# Allegro board BVP_04V3.brd
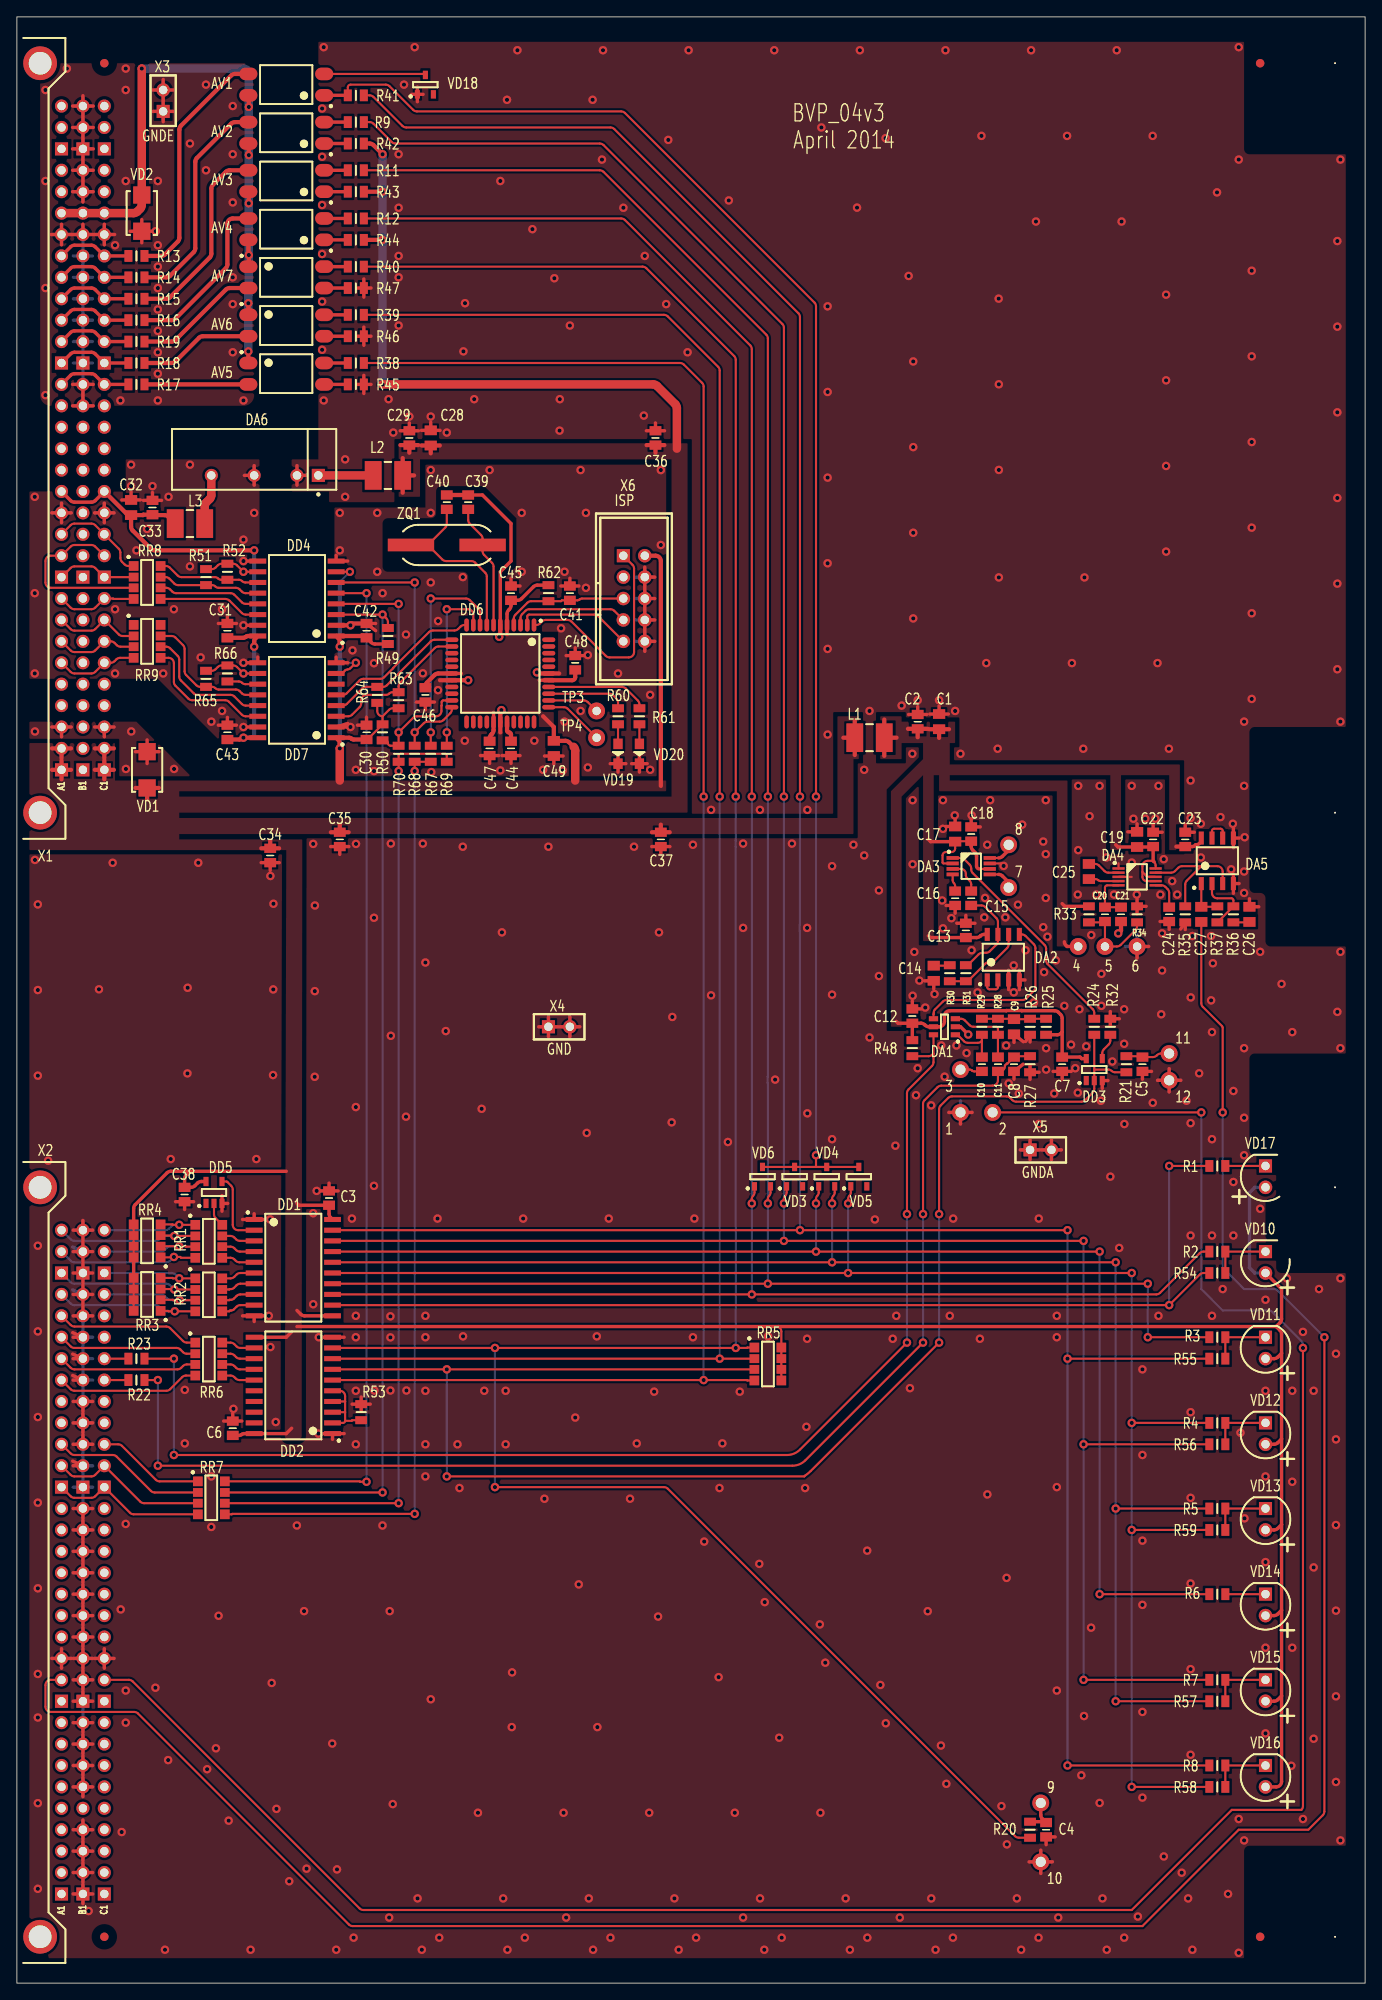
[diagram p0: board, top side]
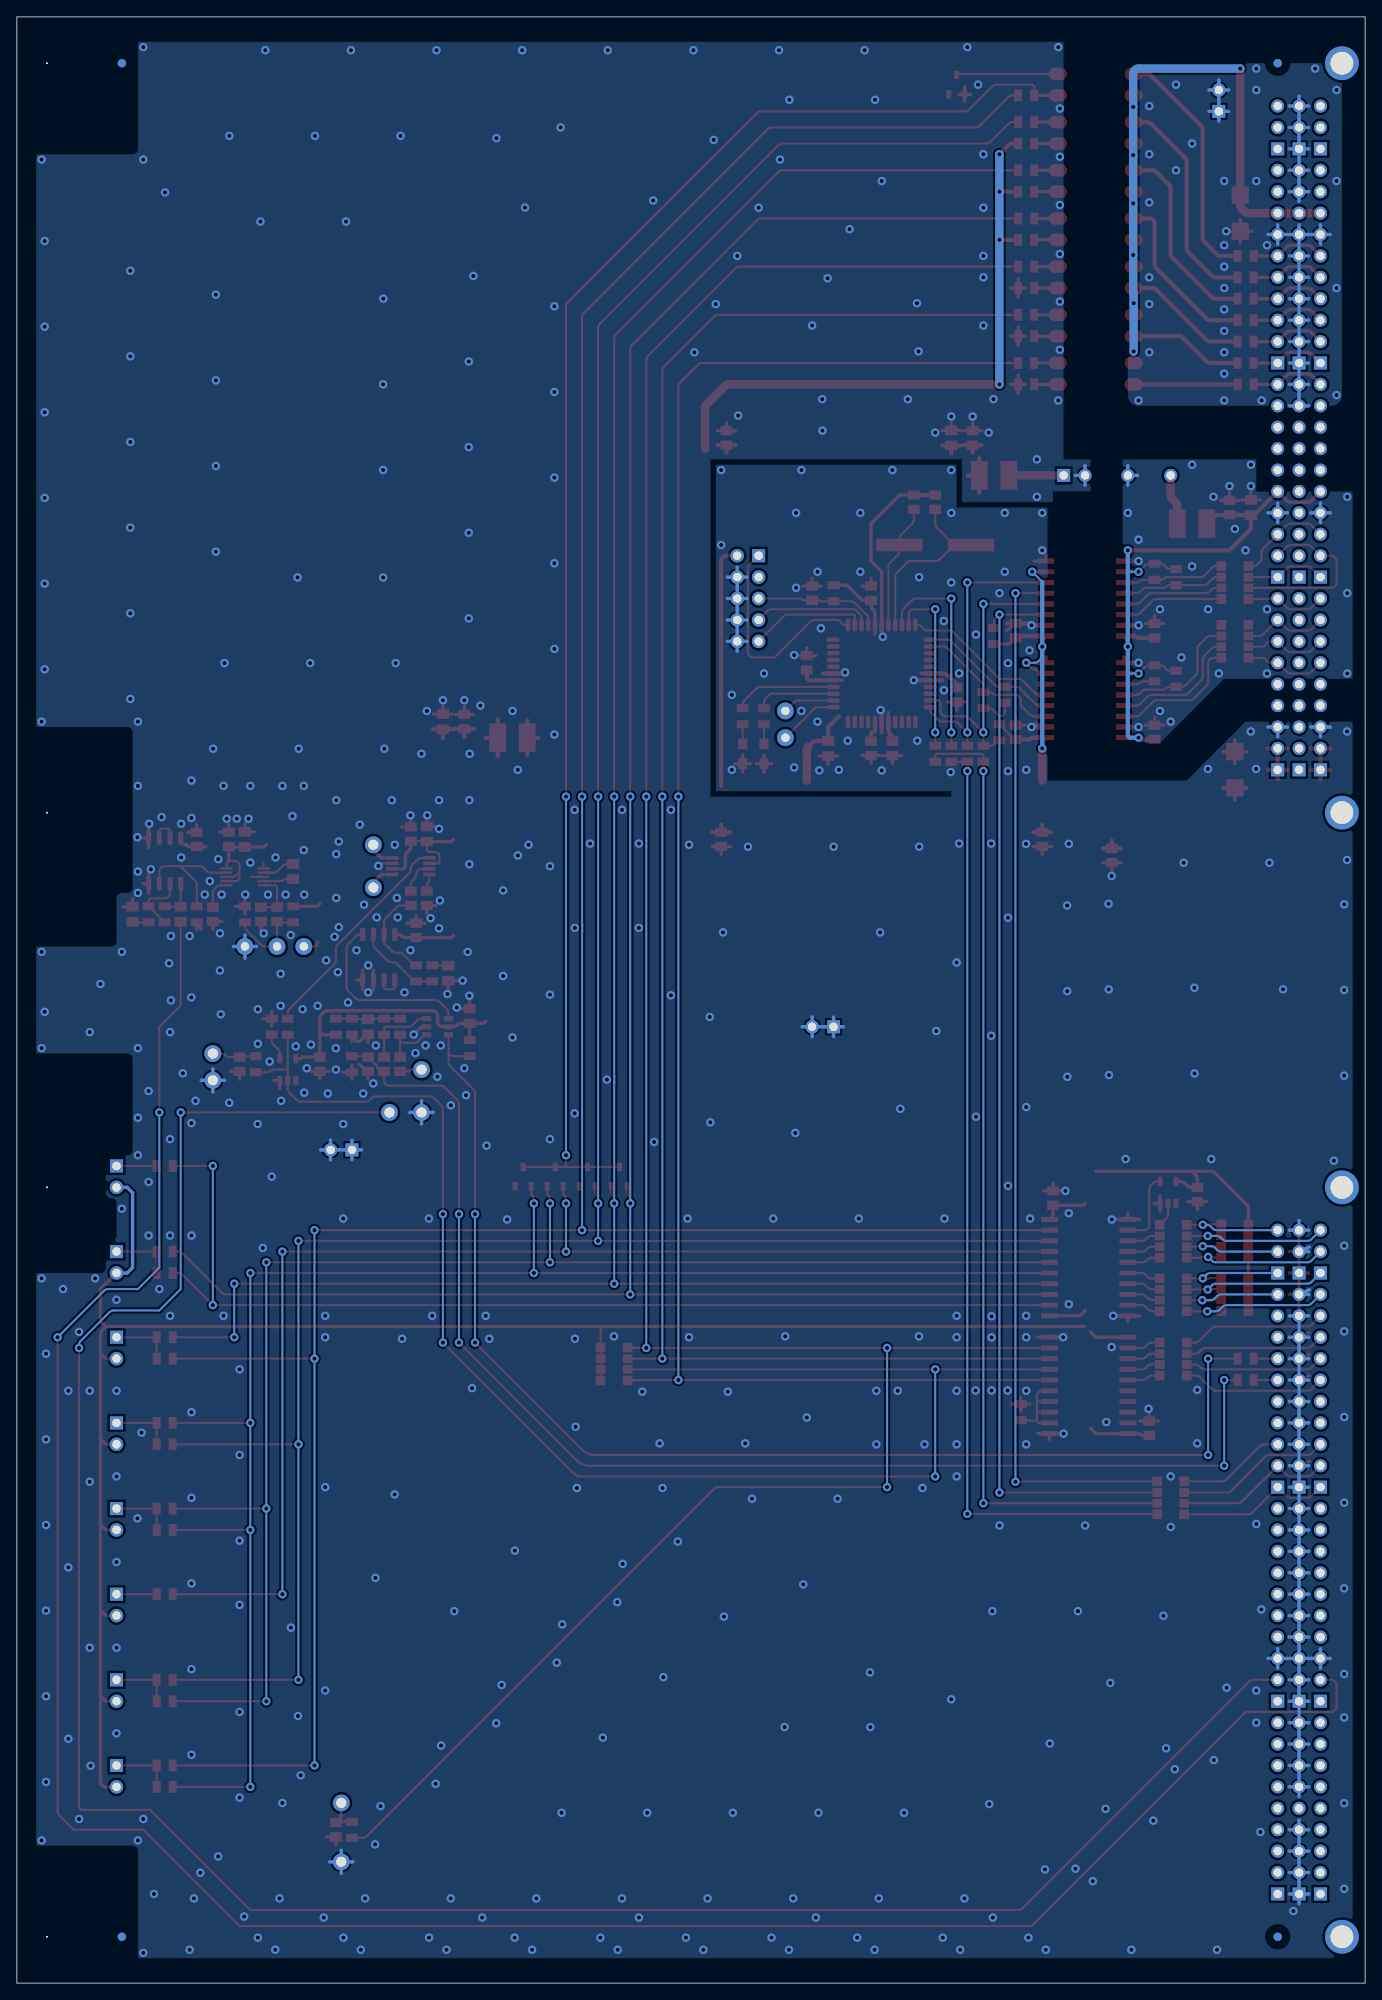
[diagram p1: board, bottom side, seen from below]

Outline 160 x 233.25 mm; copper layers: TOP, BOTTOM. Coordinates in mm from the lower left corner of the outline.
Outline path: rectangle 0,0 160,233.25

## Design rules (mm)
net group PWR: nets +5BA +5BR +24BE
nets with their own width: min track width 0.4; nets +5B GND GNDE GNDR

## Placement (name value [footprint] x y rotation side)
AV1  HCPL-817-300E  [SOIC254P1000X370-4N]  31.97 225.21 180 top
AV2  HCPL-817-300E  [SOIC254P1000X370-4N]  31.97 219.5 180 top
AV3  HCPL-817-300E  [SOIC254P1000X370-4N]  31.97 213.78 180 top
AV4  HCPL-817-300E  [SOIC254P1000X370-4N]  31.97 208.06 180 top
AV5  HCPL-817-300E  [SOIC254P1000X370-4N]  31.97 190.92 0 top
AV6  HCPL-817-300E  [SOIC254P1000X370-4N]  31.97 196.63 0 top
AV7  HCPL-817-300E  [SOIC254P1000X370-4N]  31.97 202.35 0 top
C1  10.0u  [CAPC2013X145N]  109.44 149.65 90 top
C2  0.1u  [CAPC2013X95N]  106.9 149.65 90 top
C3  0.1u  [CAPC2013X95N]  37.05 93.13 90 top
C4  0.1u  [CAPC2013X95N]  122.14 18.2 270 top
C5  0.1u  [CAPC2013X95N]  133.57 109 270 top
C6  0.1u  [CAPC2013X95N]  25.62 65.83 90 top
C7  0.1u  [CAPC2013X95N]  124.05 109 270 top
C8  1000p  [CAPC2013X95N]  118.33 109 270 top
C9  10.0u  [CAPC2013X145N]  118.33 113.45 270 top
C10  0.1u  [CAPC2013X95N]  114.52 109 90 top
C11  0.1u  [CAPC2013X95N]  116.43 109 270 top
C12  0.1u  [CAPC2013X95N]  106.27 114.72 270 top
C13  0.1u  [CAPC2013X95N]  112.62 124.88 270 top
C14  10.0u  [CAPC2013X145N]  108.81 119.8 270 top
C15  0.1u  [CAPC2013X95N]  113.25 128.69 90 top
C16  0.1u  [CAPC2013X95N]  111.34 128.69 90 top
C17  10.0u  [CAPC2013X145N]  111.34 136.31 90 top
C18  0.1u  [CAPC2013X95N]  113.25 136.31 270 top
C19  10.0u  [CAPC2013X145N]  132.94 135.68 90 top
C20  0.1u  [CAPC2013X95N]  129.12 126.78 90 top
C21  1000p  [CAPC2013X95N]  131.03 126.78 90 top
C22  0.1u  [CAPC2013X95N]  134.84 135.68 90 top
C23  0.1u  [CAPC2013X95N]  138.65 135.68 90 top
C24  2.2u  [CAPC2013X95N]  136.75 126.78 270 top
C25  10.0u  [CAPC2013X145N]  127.22 131.87 270 top
C26  10.0u  [CAPC2013X145N]  146.27 126.78 90 top
C27  10.0u  [CAPC2013X145N]  140.55 126.78 270 top
C28  10.0u  [CAPC2013X145N]  49.11 183.3 90 top
C29  0.1u  [CAPC2013X95N]  46.57 183.3 90 top
C30  0.1u  [CAPC2013X95N]  41.49 148.38 90 top
C31  0.1u  [CAPC2013X95N]  24.98 160.44 90 top
C32  10.0u  [CAPC2013X145N]  13.55 175.04 90 top
C33  0.1u  [CAPC2013X95N]  16.09 175.04 90 top
C34  0.1u  [CAPC2013X95N]  30.06 133.77 270 top
C35  0.1u  [CAPC2013X95N]  38.32 135.68 270 top
C36  0.1u  [CAPC2013X95N]  75.79 183.3 90 top
C37  0.1u  [CAPC2013X95N]  76.42 135.68 270 top
C38  0.1u  [CAPC2013X95N]  19.91 93.55 270 top
C39  22p  [CAPC2013X70N]  53.56 175.68 270 top
C40  22p  [CAPC2013X70N]  51.02 175.68 270 top
C41  0.1u  [CAPC2013X95N]  65.62 164.88 90 top
C42  0.1u  [CAPC2013X95N]  41.49 160.44 90 top
C43  0.1u  [CAPC2013X95N]  24.98 148.38 90 top
C44  0.1u  [CAPC2013X95N]  58.64 146.47 270 top
C45  0.1u  [CAPC2013X95N]  58.64 164.88 90 top
C46  0.1u  [CAPC2013X95N]  48.48 152.82 270 top
C47  0.1u  [CAPC2013X95N]  56.1 146.47 270 top
C48  0.1u  [CAPC2013X95N]  66.26 156.63 90 top
C49  10.0u  [CAPC2013X145N]  63.72 146.47 270 top
DA1  TS5A3160  [SOT95P280X145-6N]  110.08 113.45 180 top
DA2  AD8532  [SOIC127P600X175-8N]  117.06 121.7 90 top
DA3  SSM2301  [SOP65P490X110-8N]  113.25 132.5 0 top
DA4  SSM2167  [SOP50P490X110-10N]  132.94 131.23 0 top
DA5  AD8532  [SOIC127P600X175-8N]  142.46 133.13 90 top
DA6  TMA 0505S  [SIP720W50P254L1950H1050Q7P_S1KV]  28.16 180.76 270 top
DD1  74ACT573  [SOIC127P1030X265-20N]  32.81 84.88 0 top
DD2  74ACT573  [SOIC127P1030X265-20N]  32.81 70.91 180 top
DD3  SN74LVC1G14DBV  [SOT95P280X145-5N]  127.86 108.37 90 top
DD4  ADuM3402  [SOIC127P1032X265-16N]  33.24 164.25 180 top
DD5  SN74LVC1G14DBV  [SOT95P280X145-5N]  23.4 93.8 90 top
DD6  ATmega164  [QFP80P1200X1200X120-44N]  57.37 155.36 270 top
DD7  ADuM3402  [SOIC127P1032X265-16N]  33.24 152.19 180 top
L1  10u  [INDC4532X280N]  101.19 147.74 0 top
L2  10u  [INDC4532X280N]  44.03 178.85 180 top
L3  10u  [INDC4532X280N]  20.54 173.14 180 top
MH1  1  [MTG_100_200]  111.98 103.29 0 top
MH2  2  [MTG_100_200]  115.79 103.29 0 top
MH3  3  [MTG_100_200]  111.98 108.37 0 top
MH4  4  [MTG_085_200]  125.95 122.97 0 top
MH5  5  [MTG_085_200]  129.12 122.97 0 top
MH6  6  [MTG_085_200]  132.94 122.97 0 top
MH7  7  [MTG_100_200]  117.7 129.96 0 top
MH8  8  [MTG_100_200]  117.7 135.04 0 top
MH9  9  [MTG_100_200]  121.51 21.38 0 top
MH10  10  [MTG_100_200]  121.51 14.39 0 top
MH11  11  [MTG_100_200]  136.75 110.28 0 top
MH12  12  [MTG_100_200]  136.75 107.1 0 top
MH13  TP4  [MTG_085_200]  68.8 147.74 0 top
MH14  TP3  [MTG_085_200]  68.8 150.91 0 top
NOREF  -  [unnamed]  156.43 227.75 0 top
NOREF#2  -  [unnamed]  156.43 138.85 0 top
NOREF#3  -  [unnamed#2]  10.38 227.75 0 top
NOREF#4  -  [unnamed#2]  147.54 5.5 0 top
NOREF#5  -  [unnamed]  156.43 94.4 0 top
NOREF#6  -  [unnamed]  156.43 5.5 0 top
NOREF#7  -  [unnamed#2]  10.38 5.5 0 top
NOREF#8  -  [unnamed#2]  147.54 227.75 0 top
NOREF#9  -  [unnamed#2]  10.38 5.5 180 bottom
NOREF#10  -  [unnamed#2]  10.38 227.75 180 bottom
NOREF#11  -  [unnamed#2]  147.54 5.5 180 bottom
NOREF#12  -  [unnamed#2]  147.54 227.75 180 bottom
R1  1k  [RESC2013X60N]  142.46 96.94 0 top
R2  5.1k  [RESC2013X60N]  142.46 86.78 0 top
R3  5.1k  [RESC2013X60N]  142.46 76.62 0 top
R4  5.1k  [RESC2013X60N]  142.46 66.46 0 top
R5  5.1k  [RESC2013X60N]  142.46 56.3 0 top
R6  5.1k  [RESC2013X60N]  142.46 46.14 0 top
R7  5.1k  [RESC2013X60N]  142.46 35.98 0 top
R8  5.1k  [RESC2013X60N]  142.46 25.82 0 top
R9  510  [RESC2013X60N]  40.23 220.76 180 top
R11  510  [RESC2013X60N]  40.23 215.05 180 top
R12  510  [RESC2013X60N]  40.23 209.34 180 top
R13  2k  [RESC2013X60N]  14.19 204.89 180 top
R14  2k  [RESC2013X60N]  14.19 202.35 180 top
R15  2k  [RESC2013X60N]  14.19 199.81 180 top
R16  2k  [RESC2013X60N]  14.19 197.27 180 top
R17  2k  [RESC2013X60N]  14.19 189.65 0 top
R18  2k  [RESC2013X60N]  14.19 192.19 0 top
R19  2k  [RESC2013X60N]  14.19 194.73 0 top
R20  100  [RESC2013X60N]  120.23 18.2 270 top
R21  100  [RESC2013X60N]  131.66 109 270 top
R22  100k  [RESC2013X60N]  14.19 71.54 0 top
R23  100  [RESC2013X60N]  14.19 74.08 0 top
R24  100  [RESC2013X60N]  127.86 113.45 90 top
R25  1k  [RESC2013X60N]  122.14 113.45 270 top
R26  1k  [RESC2013X60N]  120.23 113.45 90 top
R27  10k  [RESC2013X60N]  120.23 109 270 top
R28  100k  [RESC2013X60N]  116.43 113.45 270 top
R29  100k  [RESC2013X60N]  114.52 113.45 270 top
R30  10k  [RESC2013X60N]  110.71 119.8 270 top
R31  20k  [RESC2013X60N]  112.62 119.8 90 top
R32  100  [RESC2013X60N]  129.76 113.45 90 top
R33  5.1k  [RESC2013X60N]  127.22 126.78 90 top
R34  20k  [RESC2013X60N]  132.94 126.78 270 top
R35  20k  [RESC2013X60N]  138.65 126.78 90 top
R36  10k  [RESC2013X60N]  144.36 126.78 90 top
R37  20k  [RESC2013X60N]  142.46 126.78 90 top
R38  51  [RESC2013X60N]  40.23 192.19 0 top
R39  51  [RESC2013X60N]  40.23 197.91 0 top
R40  51  [RESC2013X60N]  40.23 203.62 0 top
R41  1k  [RESC2013X60N]  40.23 223.94 180 top
R42  510  [RESC2013X60N]  40.23 218.22 180 top
R43  510  [RESC2013X60N]  40.23 212.51 180 top
R44  510  [RESC2013X60N]  40.23 206.79 180 top
R45  51  [RESC2013X60N]  40.23 189.65 0 top
R46  51  [RESC2013X60N]  40.23 195.37 0 top
R47  51  [RESC2013X60N]  40.23 201.08 0 top
R48  10k  [RESC2013X60N]  106.27 110.91 90 top
R49  10k  [RESC2013X60N]  44.03 159.81 270 top
R50  10k  [RESC2013X60N]  43.4 148.38 90 top
R51  10k  [RESC2013X60N]  22.45 166.79 90 top
R52  10k  [RESC2013X60N]  24.98 167.43 90 top
R53  10k  [RESC2013X60N]  40.86 67.73 270 top
R54  5.1k  [RESC2013X60N]  142.46 84.24 0 top
R55  5.1k  [RESC2013X60N]  142.46 74.08 0 top
R56  5.1k  [RESC2013X60N]  142.46 63.92 0 top
R57  5.1k  [RESC2013X60N]  142.46 33.44 0 top
R58  5.1k  [RESC2013X60N]  142.46 23.28 0 top
R59  5.1k  [RESC2013X60N]  142.46 53.76 0 top
R60  1k  [RESC2013X60N]  71.34 150.28 90 top
R61  1k  [RESC2013X60N]  73.88 150.28 90 top
R62  10k  [RESC2013X60N]  63.09 164.88 270 top
R63  10k  [RESC2013X60N]  45.3 152.19 270 top
R64  10k  [RESC2013X60N]  42.77 152.82 270 top
R65  10k  [RESC2013X60N]  22.45 154.72 90 top
R66  10k  [RESC2013X60N]  24.98 155.36 90 top
R67  0  [RESC2013X60N]  49.11 145.84 270 top
R68  0  [RESC2013X60N]  47.21 145.84 270 top
R69  0  [RESC2013X60N]  51.02 145.84 270 top
R70  0  [RESC2013X60N]  45.3 145.84 270 top
RR1  100  [RESCAX127P320X508X70-8N]  22.77 88 0 top
RR2  100  [RESCAX127P320X508X70-8N]  22.77 81.65 0 top
RR3  10k  [RESCAX127P320X508X70-8N]  15.46 81.7 180 top
RR4  10k  [RESCAX127P320X508X70-8N]  15.46 88.05 180 top
RR5  10k  [RESCAX127P320X508X70-8N]  89.12 73.44 0 top
RR6  100  [RESCAX127P320X508X70-8N]  22.77 74.03 0 top
RR7  100  [RESCAX127P320X508X70-8N]  23.08 57.57 0 top
RR8  100  [RESCAX127P320X508X70-8N]  15.46 166.16 0 top
RR9  100  [RESCAX127P320X508X70-8N]  15.46 159.17 0 top
VD1  6.8B  [DIOM5236X261N_NP]  15.46 143.93 90 top
VD2  30B  [DIOM5236X261N_NP]  14.82 209.97 270 top
VD3  BAT54A  [SOT95P230X110-3N]  92.3 95.67 90 top
VD4  BAT54A  [SOT95P230X110-3N]  96.11 95.67 90 top
VD5  BAT54A  [SOT95P230X110-3N]  99.92 95.67 90 top
VD6  BAT54A  [SOT95P230X110-3N]  88.48 95.67 90 top
VD10  Red  [LEDRD254W60D590H900USR]  148.17 85.51 270 top
VD11  Red  [LEDRD254W60D590H900USR]  148.17 75.35 270 top
VD12  Red  [LEDRD254W60D590H900USR]  148.17 65.19 270 top
VD13  Red  [LEDRD254W60D590H900USR]  148.17 55.03 270 top
VD14  Red  [LEDRD254W60D590H900USR]  148.17 44.87 270 top
VD15  Red  [LEDRD254W60D590H900USR]  148.17 34.71 270 top
VD16  Red  [LEDRD254W60D590H900USR]  148.17 24.55 270 top
VD17  Green  [LEDRD254W60D590H900USR]  148.17 95.67 270 top
VD18  BAT54A  [SOT95P230X110-3N]  48.48 225.21 90 top
VD19  Green  [LEDC2012X110N]  71.34 145.84 270 top
VD20  Green  [LEDC2012X110N]  73.88 145.84 270 top
X1  DIN-32x3  [DIN_41612_96_MR]  2.12 183.3 0 top
X2  DIN-32x3  [DIN_41612_96_MR]  2.12 49.95 0 top
X3  GNDE  [HDRV1X2P254]  17.37 223.31 90 top
X4  GND  [HDRV1X2P254]  64.36 113.45 0 top
X5  GNDA  [HDRV1X2P254]  121.51 98.84 0 top
X6  ISP  [IDC_10M]  73.25 164.25 0 top
ZQ1  20MHz  [XTAL1140X450X420N]  51.02 170.6 0 top

## Library data of the parts
AV1-AV7 = K1010: alternate symbols: (SOIC254P1000X370-4M)
C1-C49 = CAP_NP
DA1 = TS5A3159_g
DA2 DA5 = AD8532AR_G
DA3 = SSM2301_G
DA4 = SSM2167_G
DA6 = SIP7_SINGLE_4_6
DD1 DD2 = 74ACT573
DD3 DD5 = 74LVC1G14_G
DD4 DD7 = ADUM3402
DD6 = ATMEGA164_TQFP
L1-L3 = INDUCTOR
MH1-MH14 = MOUNTING_HOLE_PLATED
R1-R9 R11-R70 = RES_0.125W
RR1-RR9 = RES_ARRAY_4
VD1 VD2 = DIODE_TVS_BI
VD3-VD6 VD18 = DIODE_SCHOTTKY_DUAL_A
VD10-VD17 VD19 VD20 = DIODE_LED
X1 X2 = CON_32x3
X3-X5 = CON_2
X6 = CON_10_AVR_ISP
ZQ1 = QUARTZ_HC49

## Footprints (pads in the part's own frame, mm; a bottom-side part is the same pattern mirrored in y, then rotated)
CAPC2013X70N
  rect 1.1x1.4 smd: 1(-0.85,0) 2(0.85,0)
CAPC2013X95N
  rect 1.1x1.4 smd: 1(-0.85,0) 2(0.85,0)
CAPC2013X145N
  rect 1.15x1.45 smd: 1(-0.9,0) 2(0.9,0)
DIN_41612_96_MR
  rect 1.55x1.55 hole 1: A1(3.175,-39.37) A10(3.175,-16.51) A20(3.175,8.89) A30(3.175,34.29) B1(5.715,-39.37) B10(5.715,-16.51) B20(5.715,8.89) B30(5.715,34.29) C1(8.255,-39.37) C10(8.255,-16.51) C20(8.255,8.89) C30(8.255,34.29)
  round 1.55 hole 1: A2(3.175,-36.83) A3(3.175,-34.29) A4(3.175,-31.75) A5(3.175,-29.21) A6(3.175,-26.67) A7(3.175,-24.13) A8(3.175,-21.59) A9(3.175,-19.05) A11(3.175,-13.97) A12(3.175,-11.43) A13(3.175,-8.89) A14(3.175,-6.35) A15(3.175,-3.81) A16(3.175,-1.27) A17(3.175,1.27) A18(3.175,3.81) A19(3.175,6.35) A21(3.175,11.43) A22(3.175,13.97) A23(3.175,16.51) A24(3.175,19.05) A25(3.175,21.59) A26(3.175,24.13) A27(3.175,26.67) A28(3.175,29.21) A29(3.175,31.75) A31(3.175,36.83) A32(3.175,39.37) B2(5.715,-36.83) B3(5.715,-34.29) B4(5.715,-31.75) B5(5.715,-29.21) B6(5.715,-26.67) B7(5.715,-24.13) B8(5.715,-21.59) B9(5.715,-19.05) B11(5.715,-13.97) B12(5.715,-11.43) B13(5.715,-8.89) B14(5.715,-6.35) B15(5.715,-3.81) B16(5.715,-1.27) B17(5.715,1.27) B18(5.715,3.81) B19(5.715,6.35) B21(5.715,11.43) B22(5.715,13.97) B23(5.715,16.51) B24(5.715,19.05) B25(5.715,21.59) B26(5.715,24.13) B27(5.715,26.67) B28(5.715,29.21) B29(5.715,31.75) B31(5.715,36.83) B32(5.715,39.37) C2(8.255,-36.83) C3(8.255,-34.29) C4(8.255,-31.75) C5(8.255,-29.21) C6(8.255,-26.67) C7(8.255,-24.13) C8(8.255,-21.59) C9(8.255,-19.05) C11(8.255,-13.97) C12(8.255,-11.43) C13(8.255,-8.89) C14(8.255,-6.35) C15(8.255,-3.81) C16(8.255,-1.27) C17(8.255,1.27) C18(8.255,3.81) C19(8.255,6.35) C21(8.255,11.43) C22(8.255,13.97) C23(8.255,16.51) C24(8.255,19.05) C25(8.255,21.59) C26(8.255,24.13) C27(8.255,26.67) C28(8.255,29.21) C29(8.255,31.75) C31(8.255,36.83) C32(8.255,39.37)
  round 4 hole 2.7: HOLE1(0.635,-44.45) HOLE2(0.635,44.45)
DIOM5236X261N_NP
  rect 2.05x2.05 smd: A(2.15,0) C(-2.15,0)
HDRV1X2P254
  rect 1.55x1.55 hole 1: 1(-1.27,0)
  round 1.6 hole 1: 2(1.27,0)
IDC_10M
  rect 1.55x1.55 hole 1: 1(-1.27,5.08)
  round 1.6 hole 1: 2(1.27,5.08) 3(-1.27,2.54) 4(1.27,2.54) 5(-1.27,0) 6(1.27,0) 7(-1.27,-2.54) 8(1.27,-2.54) 9(-1.27,-5.08) 10(1.27,-5.08)
INDC4532X280N
  rect 2x3.4 smd: 1(-1.75,0) 2(1.75,0)
LEDC2012X110N
  rect 1.25x1.1 smd: A(-1.175,0) C(1.175,0)
LEDRD254W60D590H900USR
  round 1.6 hole 1: A(1.27,0)
  rect 1.55x1.55 hole 1: C(-1.27,0)
MTG_085_200
  round 2 hole 1: 1(0,0)
MTG_100_200
  round 2 hole 1.2: 1(0,0)
QFP80P1200X1200X120-44N
  oval 1.55x0.55 smd: 1(-5.75,4) 2(-5.75,3.2) 3(-5.75,2.4) 4(-5.75,1.6) 5(-5.75,0.8) 6(-5.75,0) 7(-5.75,-0.8) 8(-5.75,-1.6) 9(-5.75,-2.4) 10(-5.75,-3.2) 11(-5.75,-4) 23(5.75,-4) 24(5.75,-3.2) 25(5.75,-2.4) 26(5.75,-1.6) 27(5.75,-0.8) 28(5.75,0) 29(5.75,0.8) 30(5.75,1.6) 31(5.75,2.4) 32(5.75,3.2) 33(5.75,4)
  oval 0.55x1.55 smd: 12(-4,-5.75) 13(-3.2,-5.75) 14(-2.4,-5.75) 15(-1.6,-5.75) 16(-0.8,-5.75) 17(0,-5.75) 18(0.8,-5.75) 19(1.6,-5.75) 20(2.4,-5.75) 21(3.2,-5.75) 22(4,-5.75) 34(4,5.75) 35(3.2,5.75) 36(2.4,5.75) 37(1.6,5.75) 38(0.8,5.75) 39(0,5.75) 40(-0.8,5.75) 41(-1.6,5.75) 42(-2.4,5.75) 43(-3.2,5.75) 44(-4,5.75)
RESC2013X60N
  rect 0.95x1.4 smd: 1(-0.95,0) 2(0.95,0)
RESCAX127P320X508X70-8N
  rect 1.15x1.15 smd: 1(-1.6,1.955) 4(-1.6,-1.955) 5(1.6,-1.955) 8(1.6,1.955)
  rect 1.15x1.05 smd: 2(-1.6,0.635) 3(-1.6,-0.635) 6(1.6,-0.635) 7(1.6,0.635)
SIP720W50P254L1950H1050Q7P_S1KV
  rect 1.55x1.55 hole 1: 1(1.905,7.62)
  round 1.55 hole 1: 2(1.905,5.08) 4(1.905,0) 6(1.905,-5.08)
SOIC127P600X175-8N
  rect 1.55x0.6 smd: 1(-2.7,1.905) 2(-2.7,0.635) 3(-2.7,-0.635) 4(-2.7,-1.905) 5(2.7,-1.905) 6(2.7,-0.635) 7(2.7,0.635) 8(2.7,1.905)
SOIC127P1030X265-20N
  rect 2x0.6 smd: 1(-4.65,5.715) 2(-4.65,4.445) 3(-4.65,3.175) 4(-4.65,1.905) 5(-4.65,0.635) 6(-4.65,-0.635) 7(-4.65,-1.905) 8(-4.65,-3.175) 9(-4.65,-4.445) 10(-4.65,-5.715) 11(4.65,-5.715) 12(4.65,-4.445) 13(4.65,-3.175) 14(4.65,-1.905) 15(4.65,-0.635) 16(4.65,0.635) 17(4.65,1.905) 18(4.65,3.175) 19(4.65,4.445) 20(4.65,5.715)
SOIC127P1032X265-16N
  rect 2x0.6 smd: 1(-4.65,4.445) 2(-4.65,3.175) 3(-4.65,1.905) 4(-4.65,0.635) 5(-4.65,-0.635) 6(-4.65,-1.905) 7(-4.65,-3.175) 8(-4.65,-4.445) 9(4.65,-4.445) 10(4.65,-3.175) 11(4.65,-1.905) 12(4.65,-0.635) 13(4.65,0.635) 14(4.65,1.905) 15(4.65,3.175) 16(4.65,4.445)
SOIC254P1000X370-4N
  oval 2.15x1.5 smd: 1(-4.5,1.27) 2(-4.5,-1.27) 3(4.5,-1.27) 4(4.5,1.27)
SOP50P490X110-10N
  rect 1.45x0.3 smd: 1(-2.2,1) 2(-2.2,0.5) 3(-2.2,0) 4(-2.2,-0.5) 5(-2.2,-1) 6(2.2,-1) 7(2.2,-0.5) 8(2.2,0) 9(2.2,0.5) 10(2.2,1)
SOP65P490X110-8N
  rect 1.45x0.45 smd: 1(-2.2,0.975) 2(-2.2,0.325) 3(-2.2,-0.325) 4(-2.2,-0.975) 5(2.2,-0.975) 6(2.2,-0.325) 7(2.2,0.325) 8(2.2,0.975)
SOT95P230X110-3N
  rect 1x0.6 smd: 1(-1.15,0.95) 2(-1.15,-0.95) 3(1.15,0)
SOT95P280X145-5N
  rect 1.1x0.6 smd: 1(-1.3,0.95) 2(-1.3,0) 3(-1.3,-0.95) 4(1.3,-0.95) 5(1.3,0.95)
SOT95P280X145-6N
  rect 1.1x0.6 smd: 1(-1.3,0.95) 2(-1.3,0) 3(-1.3,-0.95) 4(1.3,-0.95) 5(1.3,0) 6(1.3,0.95)
unnamed
  round 0.2 hole 2.7 unplated: (0,0)
unnamed#2
  round 1 smd: (0,0)
XTAL1140X450X420N
  rect 5.5x1.5 smd: 1(-4.25,0) 2(4.25,0)

## Nets
GND: C1.2 C2.2 C3.2 C4.2 C5.2 C6.2 C7.2 C8.2 C9.2 C12.1 C13.1 C14.2 C16.1 C17.2 C18.1 C19.2 C21.1 C22.2 C23.2 C24.2 C26.2 C28.2 C29.2 C30.2 C34.2 C35.2 C36.2 C37.2 C38.2 C39.1 C40.1 C41.2 C42.2 C44.2 C45.2 C46.2 C47.2 C48.2 C49.2 DA1.2(GND) DA2.3(IN+) DA2.4(GND) DA3.7(GND) DA4.1(GND) DA4.3(EN) DA5.4(GND) DA5.5(IN+) DA6.2(-VIN) DD1.1(O\E\) DD1.10(GND) DD2.1(O\E\) DD2.10(GND) DD3.3(GND) DD4.2(1GND1) DD4.8(2GND1) DD5.3(GND) DD6.6(GND) DD6.18(GND#18) DD6.28(GND#28) DD6.39(GND#39) DD7.2(1GND1) DD7.8(2GND1) MH1.1 MH6.1 MH10.1 MH12.1 R26.1 R27.2 R32.2 R34.1 R35.1 R45.2 R46.2 R47.2 R53.1 VD1.A VD18.1(C1) VD19.C VD20.C X1.A3 X1.C3 X2.A12 X2.B1 X2.B2 X2.B3 X2.B4 X2.B6 X2.B7 X2.B8 X2.B9 X2.B10 X2.B11 X2.B12 X2.B13 X2.B14 X2.B15 X2.B16 X2.B17 X2.B18 X2.B19 X2.B20 X2.B21 X2.B22 X2.B23 X2.B24 X2.B25 X2.B26 X2.B27 X2.B28 X2.B29 X2.B30 X2.B31 X2.B32 X2.C12 X4.1 X4.2 X5.1 X5.2 X6.4(GND#1) X6.6(GND#2) X6.8(GND#3) X6.10(GND#4)
GNDE: VD2.A X1.A26 X1.B15 X1.B16 X1.B17 X1.B18 X1.B19 X1.B20 X1.B21 X1.B22 X1.B23 X1.B24 X1.B25 X1.B26 X1.B28 X1.B29 X1.B30 X1.B31 X1.B32 X1.C26 X3.1 X3.2
GNDR: C31.2 C32.2 C33.2 C43.2 DA6.4(-VOUT) DD4.9(2GND2) DD4.15(1GND2) DD7.9(2GND2) DD7.15(1GND2) X1.A13 X1.C13
1#PRD: R15.2 X1.A23 X1.C23
1#PRM: R16.2 X1.A22 X1.C22
1#WARN: R14.2 X1.A24 X1.C24
1ALARM: R13.2 X1.A25 X1.C25
1CLEAR: R18.1 X1.A20 X1.C20
1CTRLTM: R17.1 X1.A19 X1.C19
1ENDR: RR9.4 X1.A6 X1.C6
1PUSK: R19.1 X1.A21 X1.C21
1RXDR: RR9.2 X1.A8 X1.C8
1RXLN: RR8.2 X1.A10 X1.C10
1RXTM: RR8.1 X1.A12 X1.C12
1TXDR: RR9.3 X1.A7 X1.C7
1TXLN: RR8.4 X1.A9 X1.C9
1TXTM: RR8.3 X1.A11 X1.C11
+5B: C3.1 C6.1 C28.1 C29.1 C30.1 C34.1 C35.1 C36.1 C37.1 C38.1 C42.1 C45.1 C46.1 C47.1 C48.1 C49.1 DD1.11(LE) DD1.20(VCC) DD2.11(LE) DD2.20(VCC) DD4.1(VCC1) DD4.7(EN1) DD5.5(VCC) DD6.5(VCC) DD6.17(VCC#17) DD6.27(AVCC) DD6.38(VCC#38) DD7.1(VCC1) DD7.7(EN1) L1.1 L2.1 R42.1 R43.1 R44.1 R49.2 R50.2 R62.1 R63.2 R64.2 RR3.5 RR3.6 RR3.7 RR3.8 RR4.5 RR4.6 RR4.7 RR4.8 RR5.5 RR5.6 RR5.7 RR5.8 VD1.C VD10.A VD11.A VD12.A VD13.A VD14.A VD15.A VD16.A VD17.A X1.A1 X1.A2 X1.C1 X1.C2 X6.2(VCC)
+5BA: C1.1 C2.1 C7.1 C12.2 C13.2 C17.1 C18.2 C19.1 C22.1 C23.1 DA1.5(VCC) DA2.8(VCC) DA3.2(G) DA3.6(VCC) DA4.7(GATE) DA4.8(CMP) DA4.10(VCC) DA5.8(VCC) DD3.5(VCC) L1.2 MH4.1 R25.2 R33.2 R48.2
+5BR: C31.1 C32.1 C33.1 C43.1 DD4.10(EN2) DD4.16(VCC2) DD7.10(EN2) DD7.16(VCC2) L3.2 R51.2 R52.2 R65.2 R66.2 X1.A14 X1.C14
+24BE: AV1.4 AV2.4 AV3.4 AV4.4 AV5.1 AV6.1 AV7.1 VD2.C X1.A27 X1.B27 X1.C27
BUSR4: RR6.1 X2.A28
BUSR5: RR6.2 X2.A27
BUSR6: RR6.3 X2.A26
BUSR7: RR6.4 X2.A25
BUSW4: X2.C28
BUSW5: X2.C27
BUSW6: R23.1 X2.C26
BUSW7: R22.1 X2.C25
D#AC: DD1.17(Q3) R6.1 VD4.1(C1)
D#CONTROL: DD1.12(Q8) R1.1 R54.1
D#CURRENT: DD1.13(Q7) R2.1 R12.1 VD6.1(C1)
D#DISTPRM: DD1.16(Q4) R5.1 R57.1 VD4.2(C2)
D#HFRESTORE: DD1.14(Q6) R3.1 R11.1 VD6.2(C2)
D#SELFPRM: DD1.15(Q5) R4.1 R58.1 R59.1 VD5.1(C1)
D#WARN: DD1.18(Q2) R7.1 R9.1 R56.1 VD3.1(C1)
DALARM: DD1.19(Q1) R8.1 R41.1 R55.1
EN_AMP: DD2.7(D6) DD3.2(IN) R21.2 R24.1 RR5.3
EN_MCU: DD3.4(OUT) R32.1
ENDR: DD6.13(PD4/XCK1/OC1B) DD7.3(INA) R63.1
RXBSP: DD6.9(PD0/RXD0) R67.1
RXDR: DD6.11(PD2/RXD1/INT0) DD7.5(OUTC)
RXLN: RR7.2 X2.A22
RXLN_F1: DD4.5(OUTC) RR7.8
RXTALK: C27.2 X2.A11
RXTM: RR7.4 X2.A20 X2.C20
RXTM_F1: DD4.6(OUTD) DD6.22(PC3/TMS) R68.1
SOUT0: RR2.4 RR3.1 X2.A29
SOUT1: RR2.3 RR3.2 X2.C29
SOUT2: RR2.2 RR3.3 X2.A30
SOUT3: RR2.1 RR3.4 X2.C30
SOUT4: RR1.4 RR4.1 X2.A31
SOUT5: RR1.3 RR4.2 X2.C31
SOUT6: RR1.2 RR4.3 X2.A32
SOUT7: RR1.1 RR4.4 X2.C32
TP1: DD6.37(ADC0/PA0) R61.2
TP2: DD6.36(ADC1/PA1) R60.2
TP3: DD6.35(ADC2/PA2) MH14.1
TP4: DD6.34(ADC3/PA3) MH13.1
TXBSP: DD6.10(PD1/TXD0) R69.1
TXDR: DD6.12(PD3/TXD1/INT1) DD7.4(INB) R64.1
TXLN: RR7.1 X2.C22
TXLN_F1: DD4.3(INA) R49.1 RR7.7
TXTALK: MH2.1 X2.C11
TXTM: RR7.3 X2.A21 X2.C21
TXTM_F1: DD4.4(INB) DD6.21(PC2/TCK) R50.1 R70.1
XTAL1: C39.2 DD6.7(XTAL2) ZQ1.2
XTAL2: C40.2 DD6.8(XTAL1) ZQ1.1
N00551: AV7.3 R47.1
N01425: DD4.13(OUTB) RR8.6
N01429: DD4.12(INC) R51.1 RR8.7
N01441: DD4.11(IND) R52.1 RR8.8
N01449: DD4.14(OUTA) RR8.5
N02822: DA6.6(+VOUT) L3.1
N02871: DA6.1(+VIN) L2.2
N73819: DD2.8(D7) R39.2 RR5.2
N73834: DD2.9(D8) R20.2 R40.2 RR5.1
N73844: AV6.3 R46.1
N73856: AV5.3 R45.1
N77519: C10.2 DA1.1(NO) R29.2
N79567: DA1.4(COM) DA2.5(IN+)
N79970: C15.1 DA2.7(OUT) R31.2
N79985: DA2.6(IN-) R30.2 R31.1
N80092: DA2.1(OUT) DA2.2(IN-)
N80558: C15.2 DA3.3(IN+)
N80562: C16.2 DA3.4(IN-)
N80654: AV1.3 R13.1
N80678: DA3.1(EN) R24.2
N80919: AV2.3 R14.1
N81113: AV3.3 R15.1
N81310: AV4.3 R16.1
N83264: DA1.6(#) R23.2 R48.1
N83320: C9.1 R25.1 R26.2 R28.1 R29.1
N83604: C11.1 DA1.3(NC) R28.2
N85983: C8.1 C11.2 R22.2 R27.1
N94026: DA3.5(OUT+) MH7.1
N94035: DA3.8(OUT-) MH8.1
N96238: C20.2 C21.2 DA4.5(IN)
N96360: C25.1 DA4.2(VCA)
N96364: C25.2 DA4.4(BUF)
N96415: C24.1 DA4.6(AVG)
N96714: DA4.9(OUT) DA5.3(IN+) R35.2
N97065: C27.1 DA5.1(OUT) R37.2
N97073: DA5.2(IN-) R36.2 R37.1
N97121: C26.1 R36.1
N97223: DA5.6(IN-) DA5.7(OUT)
N99861: C20.1 MH5.1 R33.1 R34.2
N109598: AV1.1 R41.2 VD3.3(M) VD4.3(M) VD5.3(M) VD6.3(M)
N110708: C14.1 R30.1
N132934: C44.1 DD6.29(AREF)
N133699: C10.1 MH3.1
N148228: DD1.3(D2) RR1.7
N148236: DD1.4(D3) RR1.6
N148244: DD1.5(D4) RR1.5
N172935: AV5.4 R38.1
N172947: AV6.4 R39.1
N172960: AV7.4 R40.1
N176118: DD2.15(Q5) RR6.5
N176122: DD2.14(Q6) RR6.6
N176130: DD2.13(Q7) RR6.7
N176164: DD2.12(Q8) RR6.8
N178870: DD1.6(D5) RR2.8
N178876: DD1.7(D6) RR2.7
N178882: DD1.9(D8) RR2.5
N178888: DD1.8(D7) RR2.6
N179993: DD2.6(D5) R38.2 RR5.4
N182772: DD2.2(D1) DD2.3(D2) DD2.4(D3) DD2.5(D4) R53.2
N185164: AV6.2 R18.2
N185176: AV5.2 R17.2
N185500: R8.2 R58.2 VD16.C
N187191: AV7.2 R19.2
N188360: R2.2 R54.2 VD10.C
N193282: R7.2 R57.2 VD15.C
N193291: R4.2 R56.2 VD12.C
N193304: R3.2 R55.2 VD11.C
N194967: DD5.2(IN) RR1.8
N194988: DD1.2(D1) DD5.4(OUT)
N204600: R5.2 R59.2 VD13.C
N204692: C4.1 MH9.1 R20.1
N206929: C5.1 MH11.1 R21.1
N208084: AV1.2 VD18.3(M)
N211418: R1.2 VD17.C
N211442: R6.2 VD14.C
N211458: AV2.2 R9.2
N211470: AV4.2 R12.2
N211474: AV3.2 R11.2
N211478: AV2.1 R42.2
N211482: AV4.1 R44.2
N211486: AV3.1 R43.2
N276676: DD7.13(OUTB) RR9.6
N276680: DD7.12(INC) R65.1 RR9.7
N276692: DD7.11(IND) R66.1
N276700: DD7.14(OUTA) RR9.5
N280105: R61.1 VD20.A
N280109: R60.1 VD19.A
N289709: DD6.3(PB7/SCK) X6.7(SCK)
N290445: C41.1 DD6.4(R\E\S\E\T\) R62.2 X6.5(R\S\T\)
N290460: DD6.1(PB5/MOSI) X6.1(MOSI)
N290475: DD6.2(PB6/MISO) X6.9(MISO)
N304283: R67.2 R68.2 RR7.5
N304298: R69.2 R70.2 RR7.6

Pads without a net: DD2 16 17 18 19; DD3 1; DD5 1; DD6 14 15 16 19 20 23 24 25 26 30 31 32 33 40 41 42 43 44; DD7 6; RR9 1 8; VD3 2; VD5 2; VD18 2; X1 A4 A5 A15 A16 A17 A18 A28 A29 A30 A31 A32 B1 B2 B3 B4 B5 B6 B7 B8 B9 B10 B11 B12 B13 B14 C4 C5 C15 C16 C17 C18 C28 C29 C30 C31 C32 HOLE1 HOLE2; X2 A1 A2 A3 A4 A5 A6 A7 A8 A9 A10 A13 A14 A15 A16 A17 A18 A19 A23 A24 B5 C1 C2 C3 C4 C5 C6 C7 C8 C9 C10 C13 C14 C15 C16 C17 C18 C19 C23 C24 HOLE1 HOLE2; X6 3

## Via types
v1: diameter 1, hole 0.5, TOP to BOTTOM, 722 vias

## Routing (per net, layer and track width the routed paths; a pad name or vN(x,y) marks a point on that pad's centre or on a via; arc(x,y) is an arc through that point)
GND: length 620
  TOP w0.25: DA4.3 132.3,131.23 ; v1(117.1,132.53) 116.81,132.82 DA3.7 ; DA4.1 130.73,132.84
  TOP w0.4: VD20.C 73.88,145.66 ; VD20.C 72.95,144.66 ; VD20.C 73.88,143.66 ; VD20.C 74.81,144.66 ; VD19.C 72.27,144.66 ; VD19.C 71.34,143.66 ; VD19.C 70.41,144.66 ; VD19.C 71.34,145.66 ; 65.62,165.74 66.7,165.74 ; 65.62,165.74 64.55,165.74 ; 65.62,165.74 65.62,166.66 ; 117.7,120.16 DA2.3 117.7,117.85 ; X2.B11 8.99,35.98 ; X2.B11 7.84,37.13 ; X2.B11 7.84,34.83 ; X2.B11 6.69,35.98 ; X6.6 75.69,164.25 ; X6.6 74.52,163.07 ; X6.6 74.52,165.43 ; 39.27,149.42 DD7.2 39.27,149.01 ; 35.97,93.98 C3.2 ; C3.2 37.05,94.91 ; C3.2 38.13,93.98 ; 7.84,29.75 X2.B9 ; X2.B9 6.69,30.9 ; X2.B9 8.99,30.9 ; 118.33,111.6 C9.2 119.43,111.68 ; X2.B15 8.99,46.14 ; X2.B15 7.84,44.99 ; X2.B15 6.69,46.14 ; X2.B15 7.84,47.29 ; MH1.1 113.36,103.29 ; MH1.1 111.98,101.91 ; MH1.1 110.6,103.29 ; X2.B14 8.99,43.6 ; X2.B14 7.84,42.45 ; X2.B14 6.69,43.6 ; X2.B14 7.84,44.75 ; 7.84,80.55 X2.B29 ; X2.B29 6.69,81.7 ; X2.B29 8.99,81.7 ; X2.B29 7.84,82.85 ; X2.B13 8.99,41.06 ; X2.B13 7.84,42.21 ; X2.B13 7.84,39.91 ; X2.B13 6.69,41.06 ; 6.69,66.46 X2.B23 ; X2.B23 8.99,66.46 ; X2.B23 7.84,65.31 ; X2.B23 7.84,67.61 ; 146.27,128.64 C26.2 147.37,127.69 ; DD2.1 38.84,65.19 ; DD2.1 37.46,64.51 ; DD2.1 36.08,65.19 ; 119.41,109 C8.2 118.33,107.23 ; 6.69,61.38 X2.B21 6.63,61.92 ; R46.2 41.17,196.44 ; R46.2 42.03,195.37 ; R46.2 41.17,194.29 ; R46.2 40.32,195.37 ; R32.2 130.84,114.4 ; R32.2 129.76,113.55 ; R32.2 129.76,115.25 ; 28.16,78.48 DD1.10 ; DD1.10 29.54,79.16 ; DD1.10 26.78,79.16 ; X2.C12 10.38,39.67 ; X2.C12 9.23,38.52 ; X2.C12 11.53,38.52 ; X2.C12 10.38,37.37 ; 113.25,138.09 C18.1 114.33,137.16 ; X2.B28 7.84,80.31 ; X2.B28 8.99,79.16 ; X2.B28 6.69,79.16 ; X2.B17 8.99,51.22 ; X2.B17 6.69,51.22 ; X2.B17 7.84,50.07 ; X2.B17 7.84,52.37 ; 128.81,106.14 DD3.3 129.48,107.07 ; 6.69,48.68 X2.B16 ; X2.B16 8.99,48.68 ; X2.B16 7.84,49.83 ; X2.B16 7.84,47.53 ; X4.2 65.62,114.63 ; X4.2 65.62,112.27 ; X4.2 64.45,113.45 ; X4.2 66.8,113.45 ; X2.B4 8.99,18.2 ; X2.B4 7.84,19.35 ; X2.B4 7.84,17.05 ; X2.B4 6.69,18.2 ; X2.B7 7.84,26.97 ; X2.B7 8.99,25.82 ; X2.B7 6.69,25.82 ; X2.B7 7.84,24.67 ; 5.3,37.37 X2.A12 ; X2.A12 5.3,39.67 ; X2.A12 4.15,38.52 ; X2.A12 6.45,38.52 ; C36.2 75.79,185.08 ; C36.2 76.86,184.15 ; C36.2 74.71,184.15 ; 6.69,23.28 X2.B6 ; X2.B6 7.84,22.13 ; X2.B6 7.84,24.43 ; X2.B6 8.99,23.28 ; 7.84,37.37 X2.B12 ; X2.B12 8.99,38.52 ; X2.B12 7.84,39.67 ; X2.B12 6.69,38.52 ; C47.2 57.18,145.62 ; C47.2 55.02,145.62 ; C47.2 56.1,144.69 ; R47.2 41.17,202.16 ; R47.2 40.32,201.08 ; R47.2 42.03,201.08 ; R47.2 41.17,200 ; C13.1 112.62,126.66 ; C13.1 113.69,125.73 ; C13.1 111.54,125.73 ; 118.97,117.85 DA2.4 ; DA2.4 119.64,119 ; DA2.4 118.97,120.16 ; 107.34,115.57 C12.1 106.27,116.5 ; X2.B22 7.84,65.07 ; X2.B22 6.69,63.92 ; X2.B22 8.99,63.92 ; 138.11,125.04 R35.1 138.65,124.98 ; 134.84,137.45 C22.2 135.92,136.53 ; 136.75,105.72 MH12.1 ; MH12.1 138.12,107.1 ; MH12.1 135.37,107.1 ; MH12.1 136.75,108.48 ; 37.24,134.82 38.32,134.82 ; 38.32,134.82 38.32,133.9 ; 38.32,134.82 39.4,134.82 ; 41.17,188.57 R45.2 ; R45.2 42.03,189.65 ; R45.2 40.32,189.65 ; R45.2 41.17,190.73 ; 134.65,108.16 C5.2 133.57,107.23 ; 6.69,28.36 X2.B8 ; X2.B8 7.84,27.21 ; X2.B8 7.84,29.51 ; X2.B8 8.99,28.36 ; R53.1 40.86,69.53 ; R53.1 41.94,68.68 ; R53.1 39.78,68.68 ; R53.1 40.86,67.83 ; 105.82,150.5 C2.2 ; C2.2 106.9,151.42 ; C2.2 107.98,150.5 ; DD1.1 28.16,91.27 ; DD1.1 26.78,90.59 ; DD1.1 29.54,90.59 ; 30.06,131.99 C34.2 ; C34.2 28.99,132.92 ; C34.2 31.14,132.92 ; DD5.3 25.02,92.5 ; DD5.3 24.34,91.57 ; DD5.3 24.34,93.42 ; X2.B30 7.84,85.39 ; X2.B30 7.84,83.09 ; X2.B30 6.69,84.24 ; X2.B30 8.99,84.24 ; 4.15,149.01 X1.A3 ; X1.A3 5.3,147.86 ; X1.A3 6.45,149.01 ; 39.27,168.69 DD4.8 37.89,169.37 ; 108.34,150.54 109.44,150.54 ; 109.44,150.54 109.44,151.5 ; 109.44,150.54 110.54,150.54 ; 6.69,89.32 X2.B32 ; X2.B32 8.99,89.32 ; X2.B32 7.84,90.47 ; X2.B32 7.84,88.17 ; 74.52,157.99 X6.10 ; X6.10 74.52,160.35 ; X6.10 75.69,159.17 ; 65.18,157.48 C48.2 ; C48.2 66.26,158.41 ; C48.2 67.34,157.48 ; 122.97,108.16 C7.2 ; C7.2 124.05,107.23 ; C7.2 125.12,108.16 ; X6.4 75.69,166.79 ; X6.4 74.52,167.97 ; X6.4 74.52,165.61 ; 76.42,133.9 76.42,134.82 ; 76.42,134.82 77.5,134.82 ; 76.42,134.82 75.34,134.82 ; MH10.1 122.88,14.39 ; MH10.1 120.13,14.39 ; MH10.1 121.51,15.77 ; MH10.1 121.51,13.01 ; 45.5,184.15 C29.2 ; C29.2 47.65,184.15 ; C29.2 46.57,185.08 ; 39.27,156.63 DD7.8 37.89,157.31 ; X2.B2 7.84,14.27 ; X2.B2 8.99,13.12 ; X2.B2 7.84,11.97 ; X2.B2 6.69,13.12 ; 120.23,111.65 R26.1 119.7,111.71 ; 7.84,52.61 X2.B18 ; X2.B18 8.99,53.76 ; X2.B18 6.69,53.76 ; X2.B18 7.84,54.91 ; 33.24,177.7 DA6.2 ; DA6.2 34.39,178.85 ; DA6.2 33.24,180.01 ; 48.01,184.2 C28.2 ; C28.2 49.11,185.15 ; C28.2 50.22,184.2 ; 6.69,76.62 X2.B27 6.63,77.17 ; 121.6,98.84 X5.2 ; X5.2 122.78,97.67 ; X5.2 122.78,100.02 ; X5.2 123.95,98.84 ; 120.23,108.06 120.23,108.91 ; 120.23,108.06 120.23,107.2 ; 120.23,108.06 121.31,108.06 ; 61.93,113.45 X4.1 ; X4.1 63.09,112.3 ; X4.1 63.09,114.6 ; X4.1 64.24,113.45 ; X2.B19 8.99,56.3 ; X2.B19 7.84,55.15 ; X2.B19 6.69,56.3 ; 7.84,67.85 X2.B24 ; X2.B24 8.99,69 ; X2.B24 6.69,69 ; X2.B1 8.99,10.58 ; X2.B1 7.84,9.43 ; X2.B1 6.69,10.58 ; X2.B1 7.84,11.73 ; 110.27,127.84 C16.1 111.34,126.91 ; 6.69,33.44 X2.B10 ; X2.B10 7.84,34.59 ; X2.B10 8.99,33.44 ; 134.31,122.97 MH6.1 132.94,121.6 ; 123.22,17.35 C4.2 122.14,16.42 ; 46.85,224.06 VD18.1 ; VD18.1 47.53,224.94 ; VD18.1 48.21,224.06 ; VD18.1 47.53,223.18 ; 138.65,137.45 C23.2 139.73,136.53 ; DD6.6 57.37,167.43 58.64,168.69 58.64,173.14 55.25,176.53 C39.1 ; VD1.A 16.86,146.08 ; VD1.A 15.46,147.48 ; VD1.A 14.06,146.08 ; VD1.A 15.46,144.68 ; 6.63,74.62 X2.B26 6.69,74.08 ; 132.94,137.53 C19.2 131.83,136.57 ; 42.57,161.29 C42.2 42.57,160.44 ; 58.64,144.69 C44.2 ; C44.2 57.56,145.62 ; C44.2 59.72,145.62 ; X5.1 120.23,100 ; X5.1 120.23,97.69 ; X5.1 121.39,98.84 ; X5.1 119.08,98.84 ; X2.B3 7.84,16.81 ; X2.B3 6.69,15.66 ; X2.B3 7.84,14.51 ; X2.B3 8.99,15.66 ; DA5.4 145.04,130.44 ; DA5.4 144.36,131.59 ; DA5.4 144.36,129.28 ; 24.54,66.67 C6.2 ; C6.2 26.7,66.67 ; C6.2 25.62,67.6 ; 62.62,145.57 C49.2 ; C49.2 64.82,145.57 ; C49.2 63.72,144.62 ; 40.42,149.22 C30.2 41.49,150.15 ; 47.4,151.97 C46.2 ; C46.2 48.48,151.04 ; C46.2 49.56,151.97 ; 9.23,149.01 X1.C3 ; X1.C3 10.38,147.86 ; X1.C3 11.53,149.01 ; 6.69,71.54 X2.B25 6.63,72.08 ; 58.64,166.66 58.64,165.74 59.72,165.74 ; 136.75,125.01 C24.2 135.67,125.94 ; 108.81,117.95 C14.2 107.7,118.9 ; C38.2 20.98,92.7 ; C38.2 18.83,92.7 ; C38.2 19.91,91.77 ; 74.52,160.53 X6.8 ; X6.8 75.69,161.71 ; X6.8 74.52,162.89 ; 6.69,86.78 X2.B31 ; X2.B31 7.84,85.63 ; X2.B31 8.99,86.78 ; X2.B31 7.84,87.93 ; 132.94,126.88 R34.1 ; R34.1 132.94,128.59 ; R34.1 134.01,127.73 ; DA1.2 111.98,113.45 v1(112.9,112.53) ; DA5.5 145.04,135.84 ; DA5.5 144.36,136.99 ; DA5.5 144.36,134.68 ; 36.08,76.62 DD2.10 38.84,76.62 ; 110.24,137.21 C17.2 111.34,138.16
  TOP w0.5: DD6.6 57.37,159.84 v1(57.24,159.71) ; v1(130.7,124.53) 131.03,124.86 C21.1 ; 50.22,154.56 DD6.18 v1(53.56,154.56) ; 64.36,155.36 DD6.39 61.85,155.36 v1(61.72,155.49) ; C42.2 39.8,161.29 v1(39.59,161.07) DD4.2 ; 57.37,148.38 DD6.28 57.37,150.88 v1(57.5,151.01) ; C40.1 C39.1
  BOTTOM w0.4: 7.84,9.43 X2.B1 ; X2.B1 8.99,10.58 ; X2.B1 6.69,10.58 ; X2.B1 7.84,11.73 ; X2.B26 7.84,75.23 ; X2.B26 8.99,74.08 ; X2.B26 6.69,74.08 ; X2.B26 7.84,72.93 ; 120.23,97.69 X5.1 ; X5.1 121.39,98.84 ; X5.1 120.23,100 ; X5.1 119.08,98.84 ; 6.69,25.82 X2.B7 ; X2.B7 7.84,24.67 ; X2.B7 8.99,25.82 ; X2.B7 7.84,26.97 ; X2.B22 7.84,65.07 ; X2.B22 6.69,63.92 ; X2.B22 8.99,63.92 ; X2.B22 7.84,62.77 ; 6.69,38.52 X2.B12 ; X2.B12 7.84,39.67 ; X2.B12 8.99,38.52 ; X2.B12 7.84,37.37 ; MH12.1 136.75,108.48 ; MH12.1 135.37,107.1 ; MH12.1 138.12,107.1 ; MH12.1 136.75,105.72 ; 121.51,13.01 MH10.1 ; MH10.1 122.88,14.39 ; MH10.1 120.13,14.39 ; MH10.1 121.51,15.77 ; X2.A12 6.45,38.52 ; X2.A12 5.3,37.37 ; X2.A12 4.15,38.52 ; X2.A12 5.3,39.67 ; 111.98,101.91 MH1.1 ; MH1.1 110.6,103.29 ; MH1.1 111.98,104.67 ; MH1.1 113.36,103.29 ; 6.69,43.6 X2.B14 ; X2.B14 8.99,43.6 ; X2.B14 7.84,42.45 ; X2.B14 7.84,44.75 ; 6.69,86.78 X2.B31 6.63,87.33 ; X1.C3 11.53,149.01 ; X1.C3 9.23,149.01 ; X1.C3 10.38,147.86 ; X6.8 75.69,161.71 ; X6.8 74.52,160.53 ; X6.8 73.34,161.71 ; X6.8 74.52,162.89 ; 7.84,67.85 X2.B24 ; X2.B24 6.69,69 ; X2.B24 7.84,70.15 ; X2.B24 8.99,69 ; X6.6 74.52,165.43 ; X6.6 75.69,164.25 ; X6.6 74.52,163.07 ; X6.6 73.34,164.25 ; X2.B2 7.84,14.27 ; X2.B2 8.99,13.12 ; X2.B2 6.69,13.12 ; X2.B2 7.84,11.97 ; X2.B18 8.99,53.76 ; X2.B18 6.69,53.76 ; X2.B18 7.84,52.61 ; X2.B18 7.84,54.91 ; 6.69,71.54 X2.B25 ; X2.B25 7.84,70.39 ; X2.B25 8.99,71.54 ; X2.B25 7.84,72.69 ; 6.69,51.22 X2.B17 ; X2.B17 8.99,51.22 ; X2.B17 7.84,50.07 ; X2.B17 7.84,52.37 ; X2.B19 8.99,56.3 ; X2.B19 7.84,55.15 ; X2.B19 6.69,56.3 ; X2.B19 7.84,57.45 ; 6.63,82.25 X2.B29 6.69,81.7 ; X4.1 64.24,113.45 ; X4.1 63.09,114.6 ; X4.1 63.09,112.3 ; X4.1 61.93,113.45 ; X2.B10 8.99,33.44 ; X2.B10 7.84,34.59 ; X2.B10 7.84,32.29 ; X2.B10 6.69,33.44 ; X2.C12 11.53,38.52 ; X2.C12 10.38,37.37 ; X2.C12 9.23,38.52 ; X2.C12 10.38,39.67 ; X6.10 75.69,159.17 ; X6.10 73.34,159.17 ; X6.10 74.52,160.35 ; X6.10 74.52,157.99 ; X2.B6 7.84,24.43 ; X2.B6 6.69,23.28 ; X2.B6 7.84,22.13 ; X2.B6 8.99,23.28 ; 7.84,27.21 X2.B8 ; X2.B8 6.69,28.36 ; X2.B8 7.84,29.51 ; X2.B8 8.99,28.36 ; MH6.1 134.31,122.97 ; MH6.1 132.94,124.35 ; MH6.1 132.94,121.6 ; MH6.1 131.56,122.97 ; X5.2 123.95,98.84 ; X5.2 122.78,97.67 ; X5.2 121.6,98.84 ; X5.2 122.78,100.02 ; X6.4 74.52,167.97 ; X6.4 73.34,166.79 ; X6.4 75.69,166.79 ; X6.4 74.52,165.61 ; 6.69,15.66 X2.B3 ; X2.B3 7.84,16.81 ; X2.B3 7.84,14.51 ; X2.B3 8.99,15.66 ; 6.69,66.46 X2.B23 ; X2.B23 7.84,65.31 ; X2.B23 8.99,66.46 ; X2.B23 7.84,67.61 ; X2.B4 8.99,18.2 ; X2.B4 7.84,17.05 ; X2.B4 6.69,18.2 ; X2.B4 7.84,19.35 ; 6.69,58.84 X2.B20 ; X2.B20 7.84,57.69 ; X2.B20 7.84,59.99 ; X2.B20 8.99,58.84 ; X2.B27 8.99,76.62 ; X2.B27 6.69,76.62 ; X2.B27 7.84,77.77 ; X2.B27 7.84,75.47 ; X2.B13 8.99,41.06 ; X2.B13 7.84,42.21 ; X2.B13 7.84,39.91 ; X2.B13 6.69,41.06 ; 33.24,177.7 DA6.2 ; DA6.2 33.24,180.01 ; DA6.2 34.39,178.85 ; 6.69,89.32 X2.B32 ; X2.B32 8.99,89.32 ; X2.B32 7.84,90.47 ; X2.B21 8.99,61.38 ; X2.B21 6.69,61.38 ; X2.B21 7.84,60.23 ; X2.B21 7.84,62.53 ; X2.B9 7.84,32.05 ; X2.B9 8.99,30.9 ; X2.B9 7.84,29.75 ; X2.B9 6.69,30.9 ; 7.84,47.53 X2.B16 ; X2.B16 6.69,48.68 ; X2.B16 7.84,49.83 ; X2.B16 8.99,48.68 ; 64.45,113.45 X4.2 ; X4.2 66.8,113.45 ; X4.2 65.62,112.27 ; X4.2 65.62,114.63 ; 7.84,34.83 X2.B11 ; X2.B11 7.84,37.13 ; X2.B11 8.99,35.98 ; X2.B11 6.69,35.98 ; 7.84,78.01 X2.B28 ; X2.B28 8.99,79.16 ; X2.B28 6.69,79.16 ; X2.B15 8.99,46.14 ; X2.B15 7.84,47.29 ; X2.B15 6.69,46.14 ; X2.B15 7.84,44.99 ; 4.15,149.01 X1.A3 ; X1.A3 5.3,147.86 ; X1.A3 6.45,149.01
  vias: v1(2.15,148.48) v1(2.15,133.24) v1(2.49,127.97) v1(2.49,117.81) v1(2.49,107.65) v1(2.49,87.47) v1(2.49,77.31) v1(2.49,67.16) v1(2.49,56.99) v1(2.49,46.84) v1(2.49,36.67) v1(2.49,31.51) v1(2.49,21.35) v1(2.49,11.19) v1(3.71,97.56) v1(8.52,8.55) v1(9.75,117.89) v1(11.37,132.9) v1(12.32,44.33) v1(12.44,17.93) v1(12.94,144.03) v1(12.92,54.48) v1(12.92,34.71) v1(12.92,30.9) v1(13.58,148.48) v1(16.44,35.04) v1(17.58,3.96) v1(17.95,26.46) v1(18.26,97.76) v1(18.66,144.03) v1(19.93,70.38) v1(19.93,64.03) v1(20.27,118.08) v1(20.24,107.92) v1(21.53,132.9) v1(22.58,25.38) v1(23.08,60.11) v1(23.07,54.11) v1(23.62,27.86) v1(23.94,43.58) v1(25.14,19.27) v1(25.7,68.13) v1(27.74,3.96) v1(28.42,97.76) v1(29.9,79.16) v1(30.09,131.33) v1(30.06,90.59) v1(30.09,75.45) v1(30.24,35.61) v1(30.4,107.72) v1(30.45,128.04) v1(30.43,117.88) v1(30.72,66.56) v1(30.81,20.68) v1(32.32,12.09) v1(33.23,54.29) v1(34.08,44.13) v1(34.38,13.58) v1(35.17,135.15) v1(35.17,91.33) v1(35.17,80.53) v1(35.37,127.83) v1(35.36,117.67) v1(35.35,107.52) v1(35.58,93.98) v1(35.78,65.19) v1(35.83,76.62) v1(36.23,222.38) v1(36.23,216.65) v1(36.23,210.93) v1(36.23,205.12) v1(36.23,199.48) v1(36.23,193.76) v1(36.41,229.66) v1(36.41,187.75) v1(37.43,28.43) v1(37.9,3.96) v1(37.99,13.49) v1(38.32,174.41) v1(38.32,169.97) v1(38.95,180.76) v1(38.95,176.31) v1(39.59,149.01) v1(39.76,90.7) v1(39.83,158.1) v1(39.96,5.39) v1(40.23,143.93) v1(40.25,135.15) v1(40.23,103.92) v1(40.23,79.16) v1(40.23,76.62) v1(40.23,70.27) v1(40.23,63.92) v1(42.38,156.58) v1(42.38,143.78) v1(42.38,126.38) v1(42.38,94.58) v1(42.43,70.3) v1(42.77,174.41) v1(42.77,167.43) v1(43.4,164.88) v1(43.39,54.29) v1(44.11,187.9) v1(44.18,7.78) v1(44.24,44.13) v1(44.38,135.18) v1(44.38,112.38) v1(44.33,79.1) v1(44.33,76.6) v1(44.33,70.3) v1(44.67,183.94) v1(44.61,21.24) v1(45.3,216.96) v1(45.3,210.6) v1(45.3,204.89) v1(45.3,202.35) v1(45.3,196.63) v1(45.94,225.21) v1(46.18,159.98) v1(46.18,102.78) v1(46.23,70.3) v1(46.57,185.84) v1(47.21,229.66) v1(47.55,10.05) v1(48.06,3.96) v1(48.18,155.38) v1(48.18,135.18) v1(48.48,121.07) v1(48.48,79.16) v1(48.48,76.62) v1(48.48,70.27) v1(48.48,63.92) v1(48.48,60.11) v1(49.11,185.84) v1(49.11,179.49) v1(49.11,174.41) v1(49.11,166.16) v1(49.18,143.66) v1(49.12,33.67) v1(49.99,161.58) v1(49.98,153.38) v1(49.92,90.7) v1(50.12,5.39) v1(50.9,112.94) v1(51.02,183.94) v1(52.29,63.92) v1(52.52,58.73) v1(52.99,193.57) v1(52.92,166.79) v1(52.92,134.81) v1(52.95,76.72) v1(53.18,199.28) v1(53.15,147.38) v1(54.27,187.9) v1(54.72,20.21) v1(55.16,103.72) v1(55.46,70.27) v1(56.1,179.49) v1(57.37,213.78) v1(57.37,143.86) v1(57.56,124.65) v1(57.71,10.05) v1(58,70.27) v1(58,63.92) v1(58.16,223.41) v1(58.22,3.96) v1(58.77,36.86) v1(58.73,30.37) v1(59.4,229.29) v1(59.91,174.41) v1(59.91,167.43) v1(60.08,90.7) v1(60.28,5.39) v1(61.18,208.06) v1(61.41,147.38) v1(62.45,143.93) v1(62.61,57.46) v1(63.08,134.81) v1(63.78,202.24) v1(64.4,184.17) v1(64.43,187.9) v1(64.58,160.72) v1(64.77,143.86) v1(64.88,20.21) v1(64.99,167.43) v1(64.99,149.65) v1(65.18,7.78) v1(65.62,196.63) v1(66.26,67.09) v1(66.68,47.3) v1(66.9,179.49) v1(66.9,150.91) v1(67.53,174.41) v1(67.53,165.52) v1(67.63,100.86) v1(67.76,157.54) v1(67.76,144.21) v1(67.87,10.05) v1(68.33,223.41) v1(68.38,3.96) v1(68.82,76.72) v1(68.89,30.37) v1(69.44,216.32) v1(69.56,229.29) v1(70.24,90.7) v1(70.44,5.39) v1(71.34,155.36) v1(71.98,210.6) v1(72.77,57.46) v1(73.24,134.81) v1(73.56,64.03) v1(74.4,185.95) v1(74.52,204.89) v1(75.04,20.21) v1(75.15,152.82) v1(75.15,143.93) v1(75.63,70.16) v1(76.09,43.48) v1(76.2,124.65) v1(76.42,179.49) v1(76.42,170.6) v1(77.06,199.18) v1(77.3,218.65) v1(77.71,102.11) v1(77.78,114.61) v1(78.03,10.05) v1(78.54,3.96) v1(79.59,193.46) v1(79.72,229.29) v1(80.23,135.04) v1(80.23,76.62) v1(80.4,90.7) v1(80.6,5.39) v1(81.56,52.38) v1(82.38,139.18) v1(82.38,117.18) v1(83.28,36.3) v1(83.38,58.73) v1(83.72,64.03) v1(84.38,99.78) v1(84.49,211.47) v1(85.2,20.21) v1(85.79,70.16) v1(86.18,135.18) v1(86.19,125.18) v1(86.18,7.78) v1(88.11,49.74) v1(88.18,139.18) v1(88.19,10.05) v1(88.7,3.96) v1(88.75,45.2) v1(89.14,76.72) v1(89.88,229.29) v1(89.98,107.18) v1(90.46,29.11) v1(90.76,5.39) v1(91.98,135.18) v1(93.54,58.73) v1(93.69,66) v1(93.81,139.18) v1(93.78,125.18) v1(93.81,103.18) v1(93.78,76.44) v1(95.29,42.55) v1(95.36,20.21) v1(95.47,220.13) v1(95.93,38.01) v1(96.21,198.91) v1(96.21,188.75) v1(96.21,178.59) v1(96.21,168.43) v1(96.21,158.27) v1(96.21,148.11) v1(96.74,132.5) v1(96.74,117.26) v1(96.74,100.11) v1(98.35,10.05) v1(98.86,3.96) v1(99.28,135.04) v1(99.7,210.62) v1(100.04,229.29) v1(100.55,143.93) v1(100.55,133.77) v1(100.91,51.3) v1(100.92,5.39) v1(101.19,150.91) v1(101.19,112.18) v1(101.82,90.59) v1(102.3,129.63) v1(102.3,119.47) v1(102.47,35.37) v1(103.09,218.86) v1(103.12,30.83) v1(103.94,76.44) v1(104.25,99.34) v1(104.36,79.16) v1(104.78,7.78) v1(105,151.55) v1(105.83,202.52) v1(105.98,70.58) v1(106.27,145.84) v1(106.3,140.33) v1(106.3,132.73) v1(106.3,117.13) v1(106.37,192.37) v1(106.37,182.21) v1(106.37,172.05) v1(106.37,161.89) v1(106.5,122.33) v1(106.7,105.33) v1(106.9,152.19) v1(106.9,108.53) v1(107.1,118.93) v1(107.8,115.73) v1(108.09,44.12) v1(108.5,104.13) v1(108.51,10.05) v1(108.9,117.33) v1(109.02,3.96) v1(109.44,152.19) v1(109.7,111.23) v1(109.66,28.18) v1(109.8,128.43) v1(109.9,140.33) v1(109.9,136.93) v1(109.9,125.13) v1(110.1,107.53) v1(110.2,229.29) v1(110.3,23.64) v1(110.71,79.16) v1(110.9,126.33) v1(111.11,90.7) v1(111.08,5.39) v1(111.3,138.53) v1(111.34,150.91) v1(111.5,111.23) v1(111.98,145.84) v1(112.7,110.33) v1(113.3,138.53) v1(113.3,122.53) v1(114,117.53) v1(114.28,76.44) v1(114.47,219.13) v1(114.8,126.43) v1(114.9,128.73) v1(115.04,156.59) v1(115.16,135.04) v1(115.17,57.98) v1(115.5,140.33) v1(116.39,146.43) v1(116.51,199.82) v1(116.53,189.66) v1(116.53,179.5) v1(116.53,166.75) v1(116.84,21) v1(117.3,126.43) v1(117.4,111.23) v1(117.45,48.07) v1(117.48,16.46) v1(117.7,106.73) v1(118.3,120.73) v1(118.3,117.53) v1(118.67,10.05) v1(118.8,127.93) v1(118.9,105.53) v1(119.18,3.96) v1(119.3,137.43) v1(119.7,122.53) v1(120.36,229.29) v1(120.7,116.33) v1(120.94,208.97) v1(121.27,101.91) v1(121.27,90.7) v1(121.24,5.39) v1(121.8,135.42) v1(121.8,125.26) v1(121.9,119.93) v1(122.1,140.33) v1(122.1,133.93) v1(122.1,128.73) v1(122.14,110.91) v1(122.14,108.37) v1(122.3,124.13) v1(123.1,105.53) v1(123.3,121.33) v1(123.41,79.16) v1(123.41,76.62) v1(123.41,58.84) v1(123.41,34.71) v1(123.58,7.78) v1(124.3,115.93) v1(124.63,219.13) v1(125.1,111.33) v1(125.2,156.59) v1(125.6,108.53) v1(125.9,129.13) v1(125.9,105.63) v1(125.95,142.03) v1(125.95,134.41) v1(126.1,115.53) v1(126.32,24.66) v1(126.55,146.43) v1(126.69,166.75) v1(126.64,31.69) v1(126.9,111.13) v1(127.3,138.43) v1(127.5,124.33) v1(127.48,42.17) v1(128.1,129.13) v1(128.49,142.03) v1(128.49,21.38) v1(128.7,119.73) v1(128.7,115.93) v1(128.64,104.67) v1(128.83,10.05) v1(129.3,133.53) v1(129.34,3.96) v1(129.76,95.67) v1(130,109.33) v1(130.2,129.13) v1(130.52,229.29) v1(130.81,87.21) v1(131.09,208.97) v1(131.4,115.53) v1(131.4,111.43) v1(131.4,5.39) v1(131.43,101.91) v1(132.3,142.03) v1(132.3,132.93) v1(132.5,138.13) v1(132.9,129.13) v1(133.03,7.9) v1(133.57,72.81) v1(133.57,62.65) v1(133.57,52.49) v1(133.57,44.87) v1(133.57,32.17) v1(133.57,22.01) v1(133.9,138.13) v1(134.79,219.13) v1(134.8,104.43) v1(135.1,138.13) v1(135.36,156.59) v1(135.47,142.03) v1(135.47,79.16) v1(135.7,129.13) v1(135.8,114.93) v1(135.9,124.53) v1(135.9,120.13) v1(136.1,133.33) v1(136.11,15.03) v1(136.38,200.29) v1(136.38,190.13) v1(136.38,179.97) v1(136.38,169.81) v1(136.71,146.43) v1(137.1,130.73) v1(137.7,129.13) v1(138.23,13.1) v1(138.8,104.67) v1(138.99,10.05) v1(139.28,142.66) v1(139.28,138.22) v1(139.3,116.93) v1(139.28,102.02) v1(139.28,88.69) v1(139.28,67.73) v1(139.28,57.57) v1(139.28,47.41) v1(139.28,37.25) v1(139.28,27.09) v1(139.5,124.21) v1(139.5,3.96) v1(140.3,107.93) v1(140.5,137.53) v1(140.5,133.53) v1(141.72,124.21) v1(141.72,116.58) v1(141.82,112.81) v1(141.82,100.11) v1(141.82,88.69) v1(141.82,79.16) v1(141.93,120.98) v1(142.42,212.43) v1(142.83,138.32) v1(143.09,82.33) v1(143.73,10.58) v1(144.1,132.13) v1(144.3,137.53) v1(144.36,105.83) v1(144.36,95.03) v1(144.36,88.69) v1(145,229.66) v1(145,216.32) v1(145,19.47) v1(145,3.59) v1(145.21,65.3) v1(145.63,149.65) v1(145.63,142.03) v1(145.7,135.93) v1(145.63,131.87) v1(145.63,129.32) v1(145.63,110.91) v1(145.63,102.66) v1(145.63,98.21) v1(145.69,55.14) v1(145.63,16.93) v1(146.54,203.14) v1(146.54,192.98) v1(146.54,182.82) v1(146.54,172.66) v1(146.54,162.5) v1(146.54,152.34) v1(147.54,122.34) v1(147.54,91.86) v1(148.17,81.06) v1(148.17,70.27) v1(148.17,60.11) v1(148.17,49.95) v1(148.17,39.79) v1(148.17,29.63) v1(150.08,118.53) v1(150.72,83.61) v1(151.24,25.79) v1(151.35,112.81) v1(151.35,70.27) v1(151.35,59.48) v1(151.35,39.79) v1(152.62,77.25) v1(152.62,19.47) v1(153.89,70.27) v1(153.89,49.31) v1(153.89,29) v1(154.52,82.33) v1(156.54,74.66) v1(156.54,64.5) v1(156.54,54.34) v1(156.54,44.18) v1(156.54,34.02) v1(156.54,23.86) v1(156.7,206.66) v1(156.7,196.5) v1(156.7,186.34) v1(156.7,176.18) v1(156.7,166.02) v1(156.7,155.86) v1(156.7,115.22) v1(157.06,216.32) v1(157.06,149.65) v1(157.06,122.34) v1(157.06,110.91) v1(157.06,83.61) v1(157.06,16.93)
GNDE: length 140.9
  TOP w0.4: 5.3,206.2 X1.A26 ; X1.A26 6.53,207.43 ; X1.A26 5.3,208.66 ; X1.A26 4.07,207.43 ; X1.B28 9.07,212.51 ; X1.B28 7.84,211.28 ; X1.B28 7.84,213.74 ; X1.B28 6.61,212.51 ; X1.B30 9.07,217.59 ; X1.B30 6.61,217.59 ; X1.B30 7.84,216.36 ; X1.B30 7.84,218.82 ; 13.45,207.82 VD2.A ; VD2.A 14.82,206.44 ; VD2.A 16.2,207.82 ; VD2.A 14.82,209.2 ; X1.B29 7.84,216.28 ; X1.B29 7.84,213.82 ; X1.B29 9.07,215.05 ; X1.B29 6.61,215.05 ; X1.B18 9.07,187.11 ; X1.B18 6.61,187.11 ; X1.B18 7.84,188.34 ; 7.84,218.9 X1.B31 ; X1.B31 6.61,220.13 ; X1.B31 9.07,220.13 ; X1.B31 7.84,221.36 ; X1.B19 9.07,189.65 ; X1.B19 7.84,188.42 ; X1.B19 6.61,189.65 ; X3.2 18.62,224.57 ; X3.2 16.11,224.57 ; X3.2 17.37,225.83 ; X3.2 17.37,223.32 ; X3.1 18.59,222.03 ; X3.1 17.37,220.81 ; X3.1 16.14,222.03 ; X3.1 17.37,223.26 ; 10.38,206.2 X1.C26 ; X1.C26 11.61,207.43 ; X1.C26 10.38,208.66 ; X1.C26 9.15,207.43 ; X1.B32 9.07,222.67 ; X1.B32 7.84,223.9 ; X1.B32 6.61,222.67 ; X1.B32 7.84,221.44 ; 6.61,207.43 X1.B26 ; X1.B26 7.84,208.66 ; X1.B26 9.07,207.43
  BOTTOM w0.4: 7.84,216.46 X1.B30 ; X1.B30 6.71,217.59 ; X1.B30 7.84,218.72 ; X1.B30 8.97,217.59 ; X1.B24 8.97,202.35 ; X1.B24 6.71,202.35 ; X1.B24 7.84,201.22 ; X1.B24 7.84,203.48 ; 6.71,215.05 X1.B29 ; X1.B29 8.97,215.05 ; X1.B29 7.84,213.92 ; X1.B29 7.84,216.18 ; 6.71,189.65 X1.B19 ; X1.B19 7.84,190.78 ; X1.B19 8.97,189.65 ; X1.B19 7.84,188.52 ; 6.71,192.19 X1.B20 ; X1.B20 7.84,191.06 ; X1.B20 7.84,193.32 ; X1.B20 8.97,192.19 ; 6.71,207.43 X1.B26 ; X1.B26 7.84,208.56 ; X1.B26 7.84,206.3 ; X1.B26 8.97,207.43 ; 5.3,206.3 X1.A26 ; X1.A26 4.17,207.43 ; X1.A26 5.3,208.56 ; X1.A26 6.43,207.43 ; X1.B18 7.84,188.24 ; X1.B18 8.97,187.11 ; X1.B18 6.71,187.11 ; X3.1 18.49,222.03 ; X3.1 17.37,220.91 ; X3.1 17.37,223.16 ; X3.1 16.24,222.03 ; 17.37,223.42 X3.2 ; X3.2 18.52,224.57 ; X3.2 17.37,225.73 ; X3.2 16.21,224.57 ; 9.25,207.43 X1.C26 ; X1.C26 10.38,208.56 ; X1.C26 10.38,206.3 ; X1.C26 11.51,207.43 ; X1.B28 8.97,212.51 ; X1.B28 7.84,213.64 ; X1.B28 6.71,212.51 ; X1.B28 7.84,211.38 ; 6.71,222.67 X1.B32 ; X1.B32 7.84,223.8 ; X1.B32 7.84,221.54 ; X1.B32 8.97,222.67 ; X1.B25 8.97,204.89 ; X1.B25 7.84,206.02 ; X1.B25 7.84,203.76 ; X1.B25 6.71,204.89 ; 6.71,194.73 X1.B21 ; X1.B21 8.97,194.73 ; X1.B21 7.84,193.6 ; X1.B21 7.84,195.86 ; X1.B23 7.84,200.94 ; X1.B23 7.84,198.68 ; X1.B23 6.71,199.81 ; X1.B23 8.97,199.81 ; X1.B31 7.84,221.26 ; X1.B31 6.71,220.13 ; X1.B31 7.84,219 ; X1.B31 8.97,220.13 ; X1.B22 7.84,198.4 ; X1.B22 7.84,196.14 ; X1.B22 6.71,197.27 ; X1.B22 8.97,197.27
  vias: v1(3.39,224.57) v1(3.39,213.78) v1(3.39,201.08) v1(3.39,188.38) v1(5.93,227.12) v1(11.65,206.16) v1(12.29,187.75) v1(12.92,227.12) v1(12.92,224.57) v1(12.92,213.78) v1(16.48,207.82) v1(16.73,213.78) v1(16.73,206.16) v1(16.73,203.62) v1(16.73,201.08) v1(16.73,198.54) v1(16.73,196) v1(16.73,193.46) v1(16.73,190.92) v1(16.73,187.75) v1(20.54,218.22) v1(22.45,225.21) v1(22.45,215.05) v1(25.62,222.67) v1(25.62,216.96) v1(25.62,211.24) v1(25.62,202.35) v1(25.62,199.18) v1(25.62,193.46) v1(26.89,187.75)
GNDR: length 43.9
  TOP w0.4: 16.09,175.9 16.09,176.82 ; 16.09,175.9 17.17,175.9 ; 16.09,175.9 15.02,175.9 ; X1.A13 5.3,175.56 ; X1.A13 5.3,173.26 ; X1.A13 4.15,174.41 ; X1.A13 6.45,174.41 ; C43.2 26.06,149.22 ; C43.2 23.91,149.22 ; C43.2 24.98,150.15 ; C32.2 13.55,176.9 ; C32.2 14.66,175.94 ; C32.2 12.45,175.94 ; C31.2 26.06,161.29 ; C31.2 23.91,161.29 ; C31.2 24.98,162.22 ; 27.21,156.63 DD7.9 28.59,157.31 ; 27.21,168.69 DD4.9 ; X1.C13 11.53,174.41 ; X1.C13 10.38,175.56 ; X1.C13 9.23,174.41 ; X1.C13 10.38,173.26 ; 28.16,177.7 DA6.4 ; DA6.4 27.01,178.85 ; DA6.4 28.16,180.01 ; 27.21,161.07 DD4.15 ; 27.21,149.01 DD7.15
  BOTTOM w0.4: 28.16,177.7 DA6.4 ; DA6.4 27.01,178.85 ; DA6.4 28.16,180.01 ; X1.A13 6.45,174.41 ; X1.A13 5.3,175.56 ; X1.A13 5.3,173.26 ; X1.A13 4.15,174.41 ; 10.38,173.26 X1.C13 ; X1.C13 9.23,174.41 ; X1.C13 10.38,175.56 ; X1.C13 11.53,174.41
  vias: v1(2.12,176.31) v1(2.12,164.88) v1(2.12,155.36) v1(11.65,162.98) v1(11.65,155.36) v1(13.55,180.12) v1(13.55,177.59) v1(14.19,169.97) v1(15.46,172.5) v1(16.09,177.59) v1(17.37,155.36) v1(18,176.31) v1(18.63,162.98) v1(20.54,180.12) v1(20.54,168.06) v1(21.81,157.26) v1(23.08,149.65) v1(24.35,162.98) v1(24.35,150.91) v1(26.89,171.24) v1(26.89,168.69) v1(26.89,161.07) v1(26.89,156.63) v1(26.89,149.01) v1(28.16,174.41)
1#PRD: length 8.9
  TOP w0.4: X1.A23 6.38,200.89 arc(6.59,201.03) 6.83,201.08 8.85,201.08 arc(9.09,201.03) 9.3,200.89 X1.C23 R15.2
1#PRM: length 8.9
  TOP w0.4: R16.2 X1.C22 9.3,198.35 arc(9.09,198.49) 8.85,198.54 6.83,198.54 arc(6.59,198.49) 6.38,198.35 X1.A22
1#WARN: length 8.9
  TOP w0.4: X1.A24 6.38,203.43 arc(6.59,203.57) 6.83,203.62 8.85,203.62 arc(9.09,203.57) 9.3,203.43 X1.C24 R14.2
1ALARM: length 8.9
  TOP w0.4: R13.2 X1.C25 9.3,205.97 arc(9.09,206.11) 8.85,206.16 6.83,206.16 arc(6.59,206.11) 6.38,205.97 X1.A25
1CLEAR: length 8.9
  TOP w0.4: R18.1 X1.C20 9.3,193.27 arc(9.09,193.41) 8.85,193.46 6.83,193.46 arc(6.59,193.41) 6.38,193.27 X1.A20
1CTRLTM: length 8.9
  TOP w0.4: R17.1 X1.C19 9.3,190.73 arc(9.09,190.87) 8.85,190.92 6.83,190.92 arc(6.59,190.87) 6.38,190.73 X1.A19
1ENDR: length 9.7
  TOP w0.25: X1.A6 6.38,155.55 arc(6.59,155.41) 6.83,155.36 8.85,155.36 arc(9.09,155.41) 9.3,155.55 X1.C6 11.14,156.63 arc(11.39,156.68) 11.59,156.82 11.81,157.03 arc(12.01,157.17) 12.26,157.22 13.86,157.22
1PUSK: length 8.9
  TOP w0.4: R19.1 X1.C21 9.3,195.81 arc(9.09,195.95) 8.85,196 6.83,196 arc(6.59,195.95) 6.38,195.81 X1.A21
1RXDR: length 10.3
  TOP w0.25: RR9.2 12.55,159.81 arc(12.3,159.85) 12.1,159.99 X1.C8 9.3,160.63 arc(9.09,160.49) 8.85,160.44 6.83,160.44 arc(6.59,160.49) 6.38,160.63 X1.A8
1RXLN: length 9.6
  TOP w0.25: RR8.2 X1.C10 9.3,167.87 arc(9.09,168.01) 8.85,168.06 6.83,168.06 arc(6.59,168.01) 6.38,167.87 X1.A10
1RXTM: length 11.7
  TOP w0.25: RR8.1 13.23,168.11 arc(12.99,168.16) 12.78,168.3 12.47,168.61 arc(12.33,168.82) 12.29,169.06 12.29,169.7 arc(12.24,169.95) 12.1,170.15 X1.C12 9.3,172.95 arc(9.09,173.09) 8.85,173.14 6.83,173.14 arc(6.59,173.09) 6.38,172.95 X1.A12
1TXDR: length 9.8
  TOP w0.25: X1.A7 6.38,158.09 arc(6.59,157.95) 6.83,157.9 8.85,157.9 arc(9.09,157.95) 9.3,158.09 X1.C7 11.14,159.17 arc(11.39,159.12) 11.59,158.98 11.86,158.72 arc(12.06,158.58) 12.31,158.53 RR9.3
1TXLN: length 9.6
  TOP w0.25: X1.A9 6.38,163.17 arc(6.59,163.03) 6.83,162.98 8.85,162.98 arc(9.09,163.03) 9.3,163.17 X1.C9 11.41,164.25 11.46,164.2 RR8.4
1TXTM: length 21.7
  TOP w0.25: RR8.3 4.03,165.52 arc(3.58,165.71) 3.39,166.16 3.39,168.69 arc(3.58,169.14) 4.03,169.33 X1.A11 6.38,170.41 arc(6.59,170.55) 6.83,170.6 8.85,170.6 arc(9.09,170.55) 9.3,170.41 X1.C11
+5B: length 509.3
  TOP w0.25: RR4.5 RR4.6 RR4.8 ; RR5.5 RR5.6 RR5.7 RR5.8 90.72,77.3 arc(90.67,77.54) 90.53,77.75 90.39,77.89 ; 43.4,150.28 44.17,151.05 arc(44.37,151.19) 44.62,151.24 R63.2 ; 43.4,150.28 R50.2 41.6,147.53 ; 43.4,150.28 43.4,150.28 arc(42.95,150.47) 42.77,150.91 R64.2 ; DD7.7 38.33,155.36 arc(38.57,155.41) 38.78,155.55 38.94,155.71 arc(39.08,155.81) 39.25,155.84 arc(39.42,155.87) 39.56,155.97 v1(40.23,156.63) ; RR3.8 RR3.7 RR3.6 RR3.5 ; DD4.7 v1(39.52,167.43)
  TOP w0.4: 150.08,64.56 149.63,64.11 arc(149.43,63.97) 149.18,63.92 VD12.A ; 150.08,64.56 150.08,54.4 ; 150.08,64.56 150.08,74.72 ; DD1.11 34.14,79.16 arc(33.9,79.21) 33.69,79.35 33.24,79.8 ; 150.08,54.4 149.63,53.95 arc(149.43,53.81) 149.18,53.76 VD13.A ; 150.08,54.4 150.08,44.23 ; 20.54,96.31 20.09,95.86 arc(19.95,95.65) 19.91,95.41 C38.1 20.67,94.4 arc(20.91,94.45) 21.12,94.59 21.44,94.91 arc(21.65,95.05) 21.89,95.09 22.45,95.09 ; 20.54,96.31 31.97,96.31 ; 20.54,96.31 18.26,96.31 arc(18.02,96.26) 17.81,96.12 14.05,92.35 arc(13.91,92.15) 13.86,91.9 RR4.5 ; 58.17,159.98 DD6.5 58.17,162.42 arc(58.22,162.67) 58.36,162.87 58.45,162.97 arc(58.59,163.18) 58.64,163.42 C45.1 59.43,164.03 arc(59.67,164.08) 59.88,164.22 61.31,165.65 arc(61.51,165.79) 61.76,165.84 63.09,165.84 ; VD14.A 149.18,43.6 arc(149.43,43.65) 149.63,43.79 150.08,44.23 ; 150.08,44.23 150.08,34.08 ; 150.08,34.08 150.08,23.91 arc(149.89,23.47) 149.44,23.28 VD16.A ; 150.08,34.08 149.63,33.63 arc(149.43,33.49) 149.18,33.44 VD15.A ; 32.6,65.83 31.97,65.19 DD2.20 26.94,65.19 arc(26.8,65.16) 26.68,65.08 26.68,65.08 arc(26.56,65) 26.42,64.97 C6.1 ; 41.47,159.62 C42.1 42.04,159.04 arc(42.25,158.9) 42.49,158.85 R49.2 ; VD10.A 150.08,82.33 150.08,78.79 arc(150.03,78.54) 149.89,78.34 149.44,77.89 ; DD6.17 52.75,155.36 ; 150.08,74.72 149.63,74.27 arc(149.43,74.13) 149.18,74.08 VD11.A ; 150.08,74.72 150.08,76.99 arc(150.03,77.23) 149.89,77.44 149.44,77.89 ; DD1.20 37.24,90.81 arc(37.1,91.02) 37.05,91.26 C3.1 33.45,92.28 33.24,92.5 ; 149.44,77.89 33.24,77.89 ; 41.6,147.53 C30.1 ; RR4.8 RR3.5 ; DD6.27 56.57,150.74 ; 32.6,77.25 31.97,76.62 DD2.11 ; 61.99,154.56 DD6.38
  TOP w0.5: DD6.17 50.01,155.36 arc(49.77,155.31) 49.56,155.17 48.67,154.28 arc(48.53,154.07) 48.48,153.83 C46.1 ; 5.3,142.8 X1.A1 ; X1.A1 6.43,143.93 ; X1.A1 4.17,143.93 ; X1.A1 5.3,145.06 ; C37.1 76.42,137.43 ; C37.1 77.47,136.53 ; C37.1 75.37,136.53 ; 29.01,134.62 C34.1 ; C34.1 30.06,135.52 ; C34.1 31.12,134.62 ; VD1.C 16.84,141.78 ; VD1.C 15.46,140.4 ; VD1.C 14.08,141.78 ; DD6.27 56.57,148.64 arc(56.52,148.4) 56.38,148.19 56.29,148.09 arc(56.15,147.89) 56.1,147.64 C47.1 ; v1(38.32,146.47) 38.32,147.05 arc(38.27,147.29) 38.13,147.5 DD7.1 39.44,147.74 arc(39.58,147.71) 39.7,147.63 39.7,147.63 arc(39.82,147.55) 39.96,147.53 C30.1 ; 62.45,150.28 63.72,149.01 C49.1 65.1,147.37 arc(65.34,147.32) 65.55,147.18 66.07,146.66 ; 99.44,145.69 L1.1 ; L1.1 99.44,149.79 ; L1.1 98.08,147.74 ; R43.1 v1(43.4,212.51) ; v1(43.4,216.96) 42.32,218.04 arc(42.11,218.18) 41.87,218.22 R42.1 ; 9.25,143.93 X1.C1 ; X1.C1 10.38,145.06 ; X1.C1 11.51,143.93 ; X1.C1 10.38,142.8 ; DD6.38 65.92,154.56 arc(66.16,154.66) 66.26,154.9 C48.1 ; 76.42,142.03 76.42,168.69 arc(76.23,169.14) 75.79,169.33 X6.2 ; C35.1 38.32,137.43 ; C35.1 37.27,136.53 ; C35.1 39.37,136.53 ; 45.78,176.8 L2.1 ; L2.1 47.14,178.85 ; L2.1 45.78,180.91 ; 48.04,182.4 C28.1 ; C28.1 49.11,181.47 ; C28.1 50.19,182.4 ; 75.79,181.55 C36.1 ; C36.1 74.73,182.45 ; C36.1 76.84,182.45 ; C29.1 47.63,182.45 ; C29.1 46.57,181.55 ; C29.1 45.52,182.45 ; X1.C2 11.51,146.47 ; X1.C2 9.25,146.47 ; X1.C2 10.38,145.34 ; 5.3,145.34 X1.A2 ; X1.A2 6.43,146.47 ; X1.A2 4.17,146.47 ; v1(38.32,158.53) 38.32,159.11 arc(38.27,159.36) 38.13,159.56 DD4.1 41.02,159.81 arc(41.26,159.76) 41.47,159.62 ; R44.1 v1(43.4,206.79)
  TOP w1: 78.33,182.03 78.33,186.85 arc(78.28,187.09) 78.14,187.3 75.97,189.46 arc(75.76,189.6) 75.52,189.65 v1(43.4,189.65) ; v1(38.32,146.47) 38.32,142.66 ; 66.26,142.66 66.26,146.21 arc(66.21,146.45) 66.07,146.66
  BOTTOM w0.25: v1(40.23,156.63) 39.22,156.63 arc(38.97,156.68) 38.77,156.82 38.32,157.26 ; v1(39.52,167.43) 38.32,166.23
  BOTTOM w0.4: VD17.A 146.91,94.4 146.27,93.77 146.27,84.88 146.91,84.24 VD10.A
  BOTTOM w0.5: 38.32,166.23 v1(38.32,158.53) v1(38.32,146.47)
  BOTTOM w1: v1(43.4,189.65) v1(43.4,206.79) v1(43.4,212.51) v1(43.4,216.96)
